# EAGLE board SparkFun_XBee_Explorer_USB-C-Panel (EAGLE 9.6.2), part 1 of 2
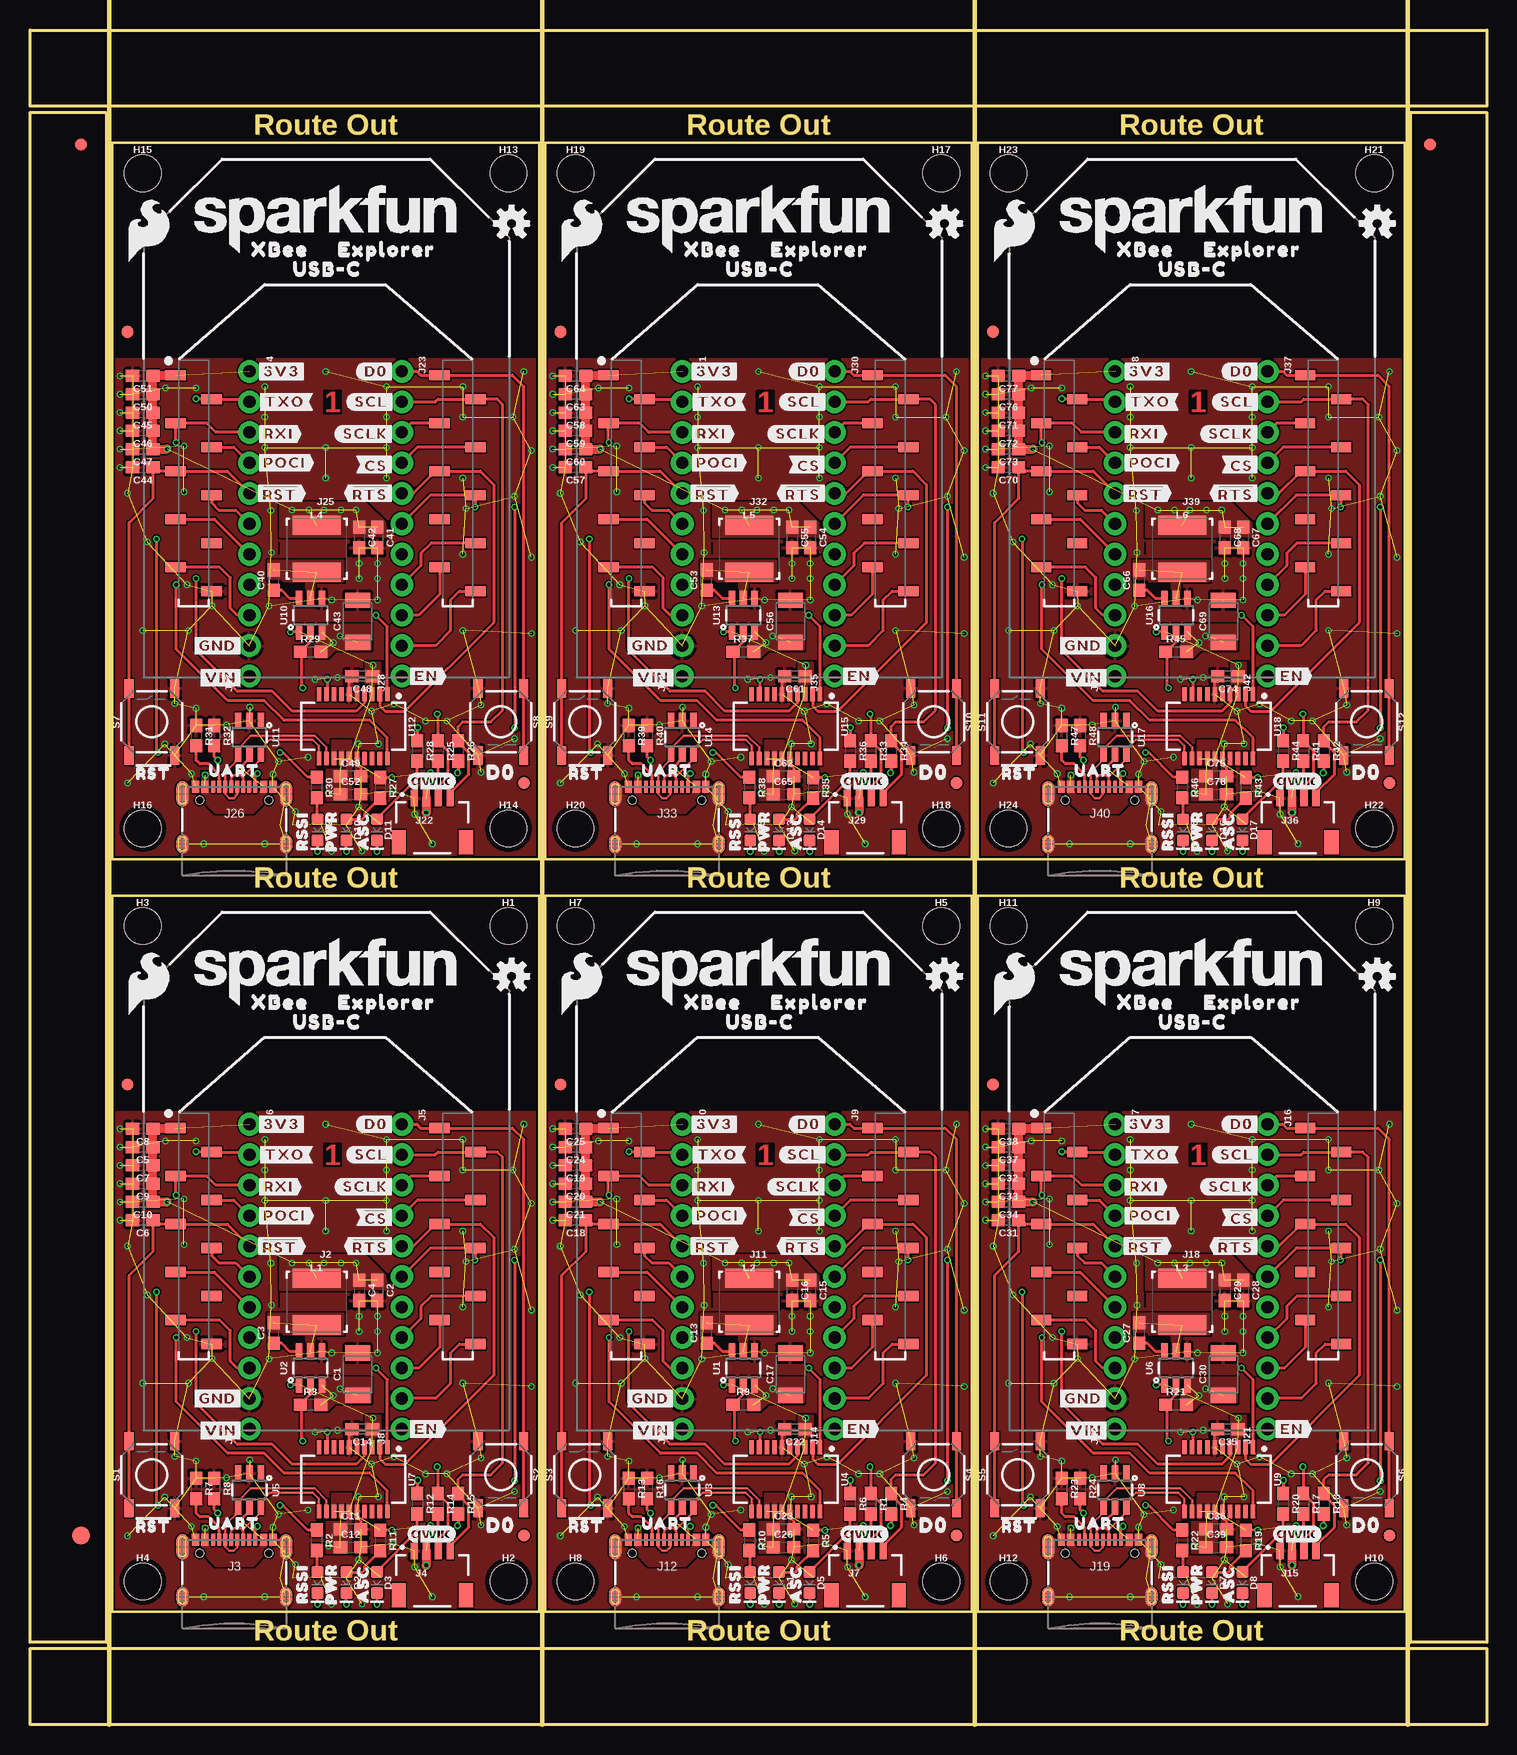
[diagram p0: board, top side]
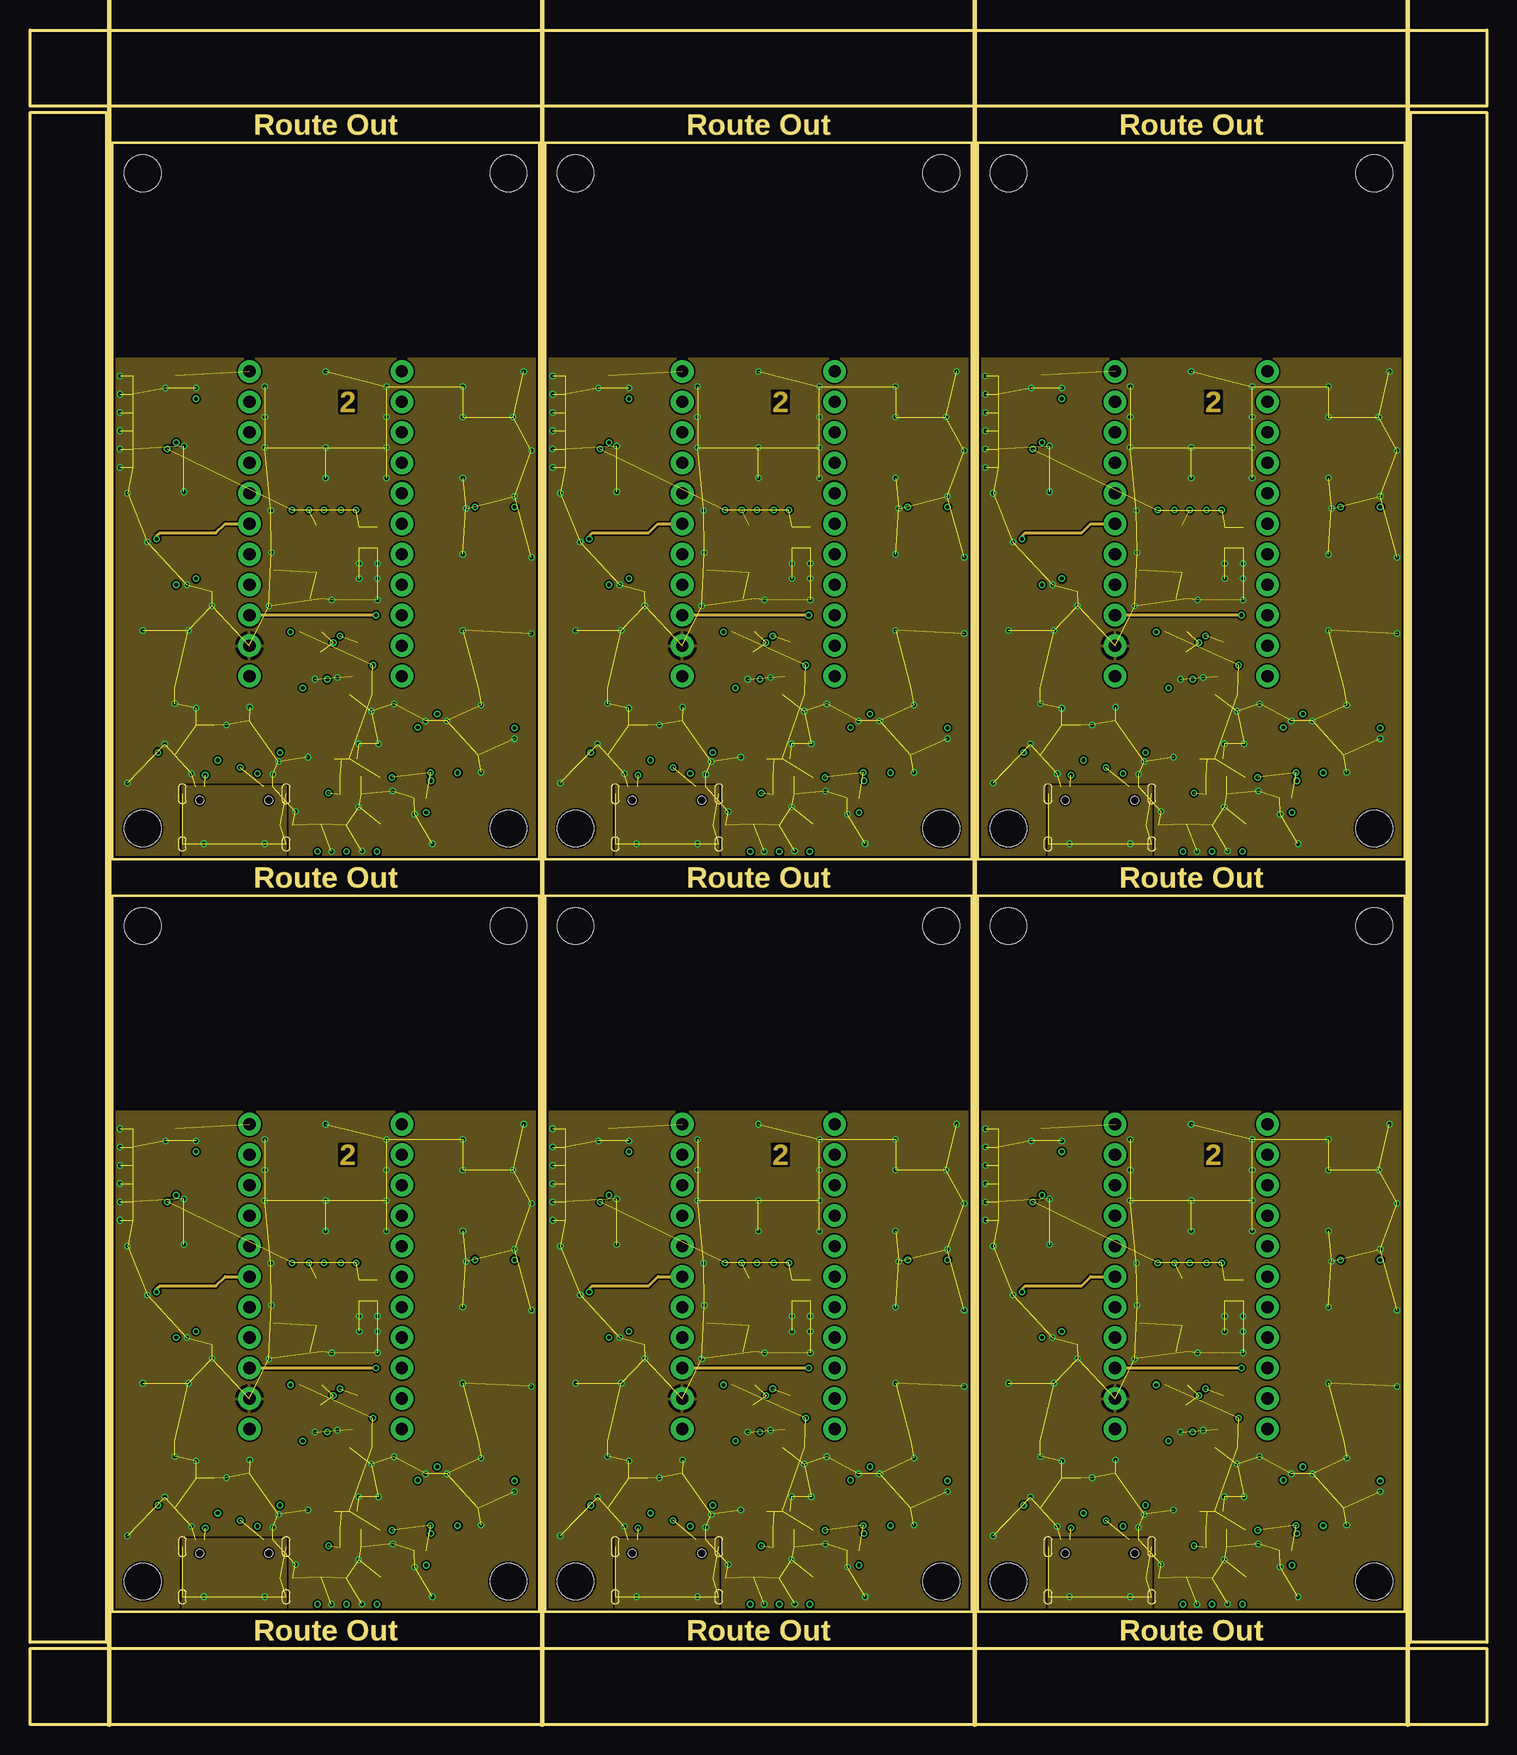
[diagram p1: board, inner layer Route2]
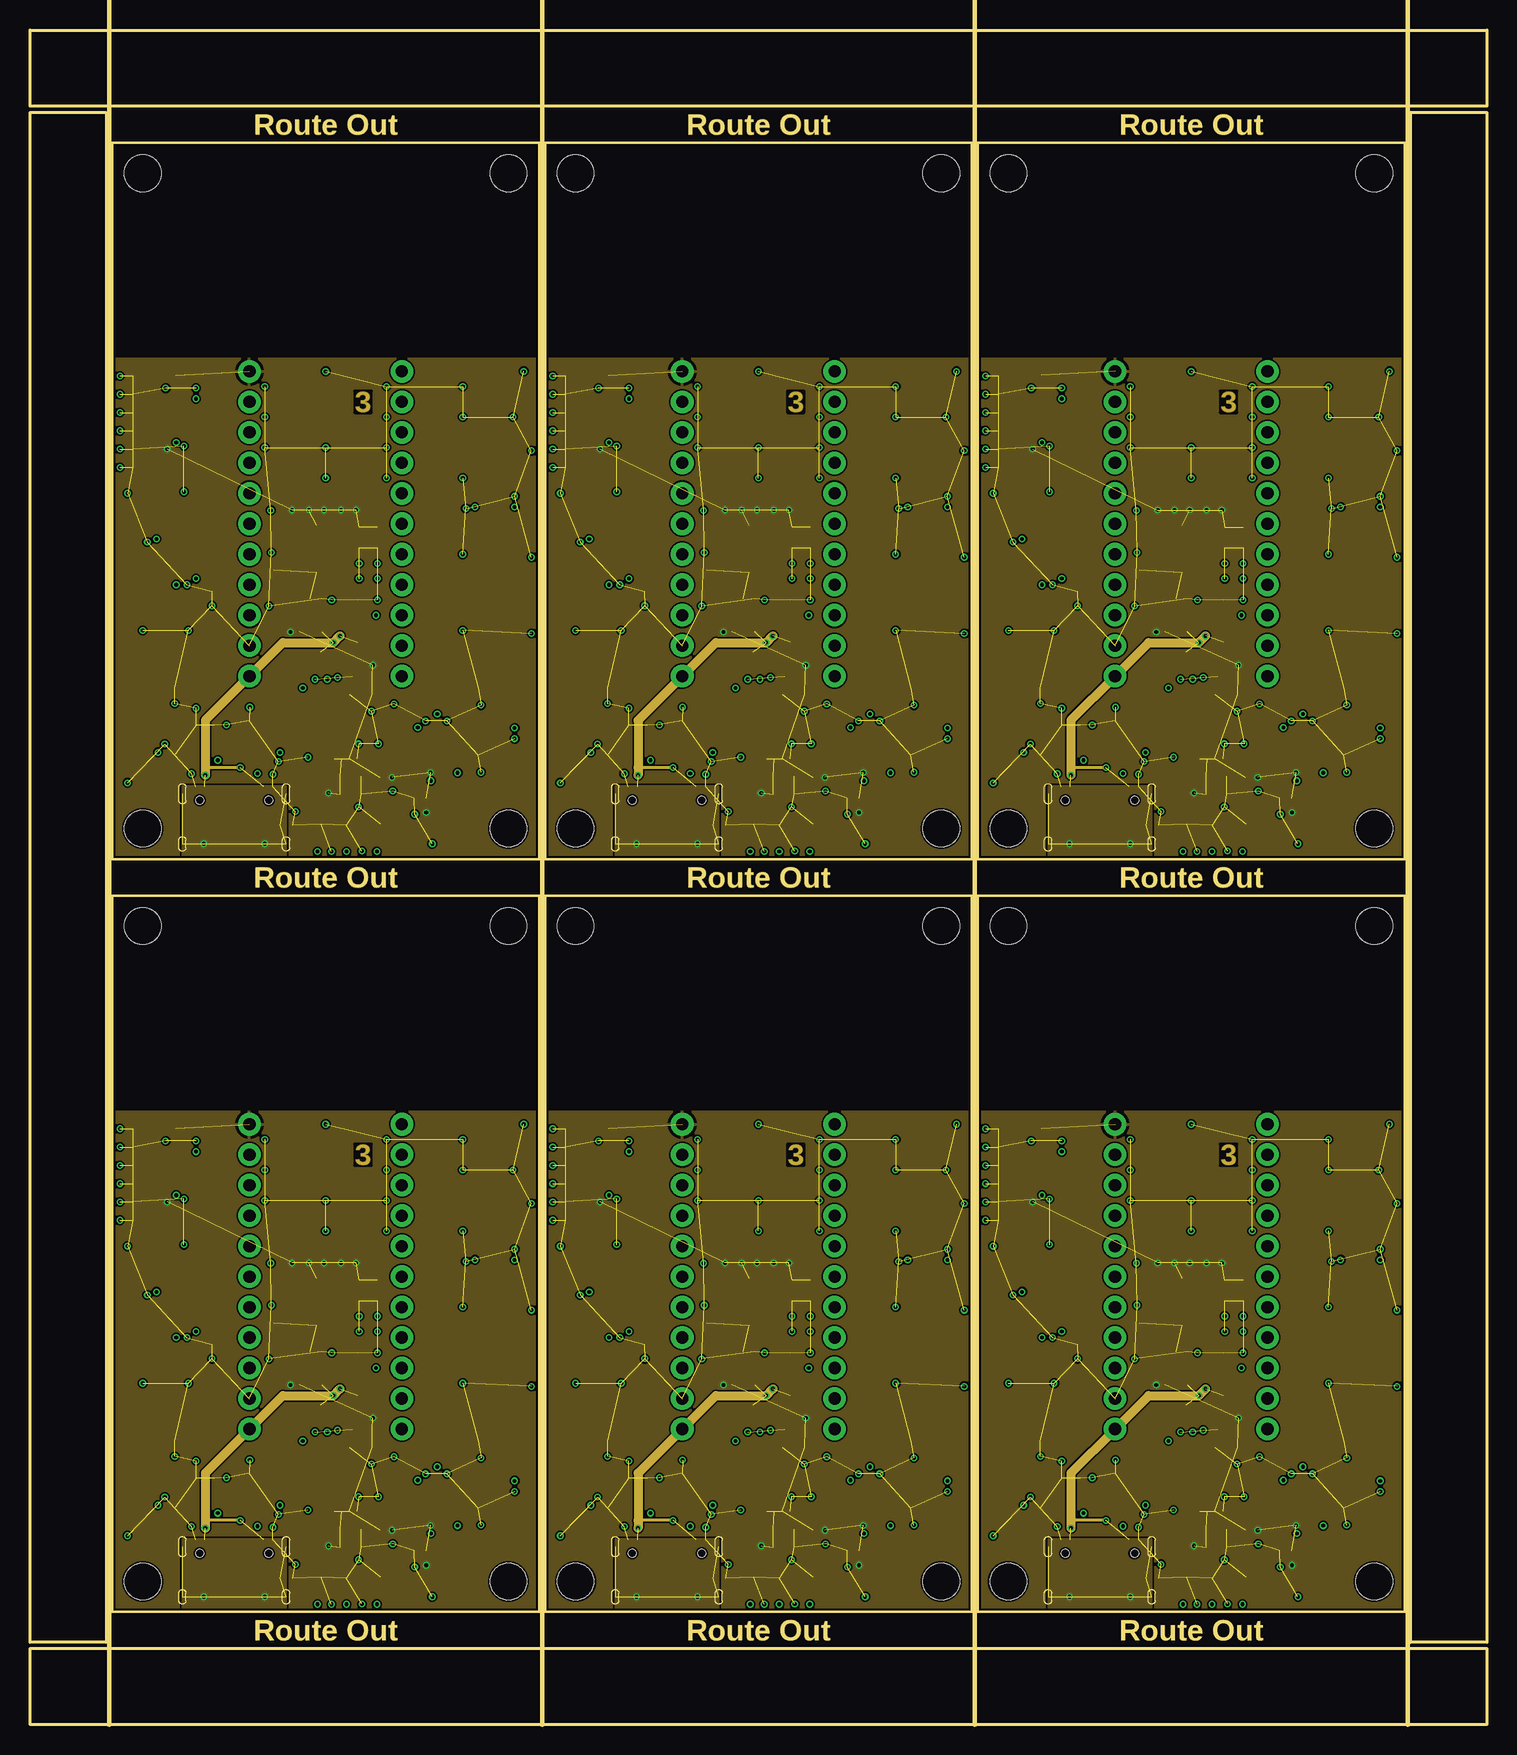
[diagram p2: board, inner layer Route15]
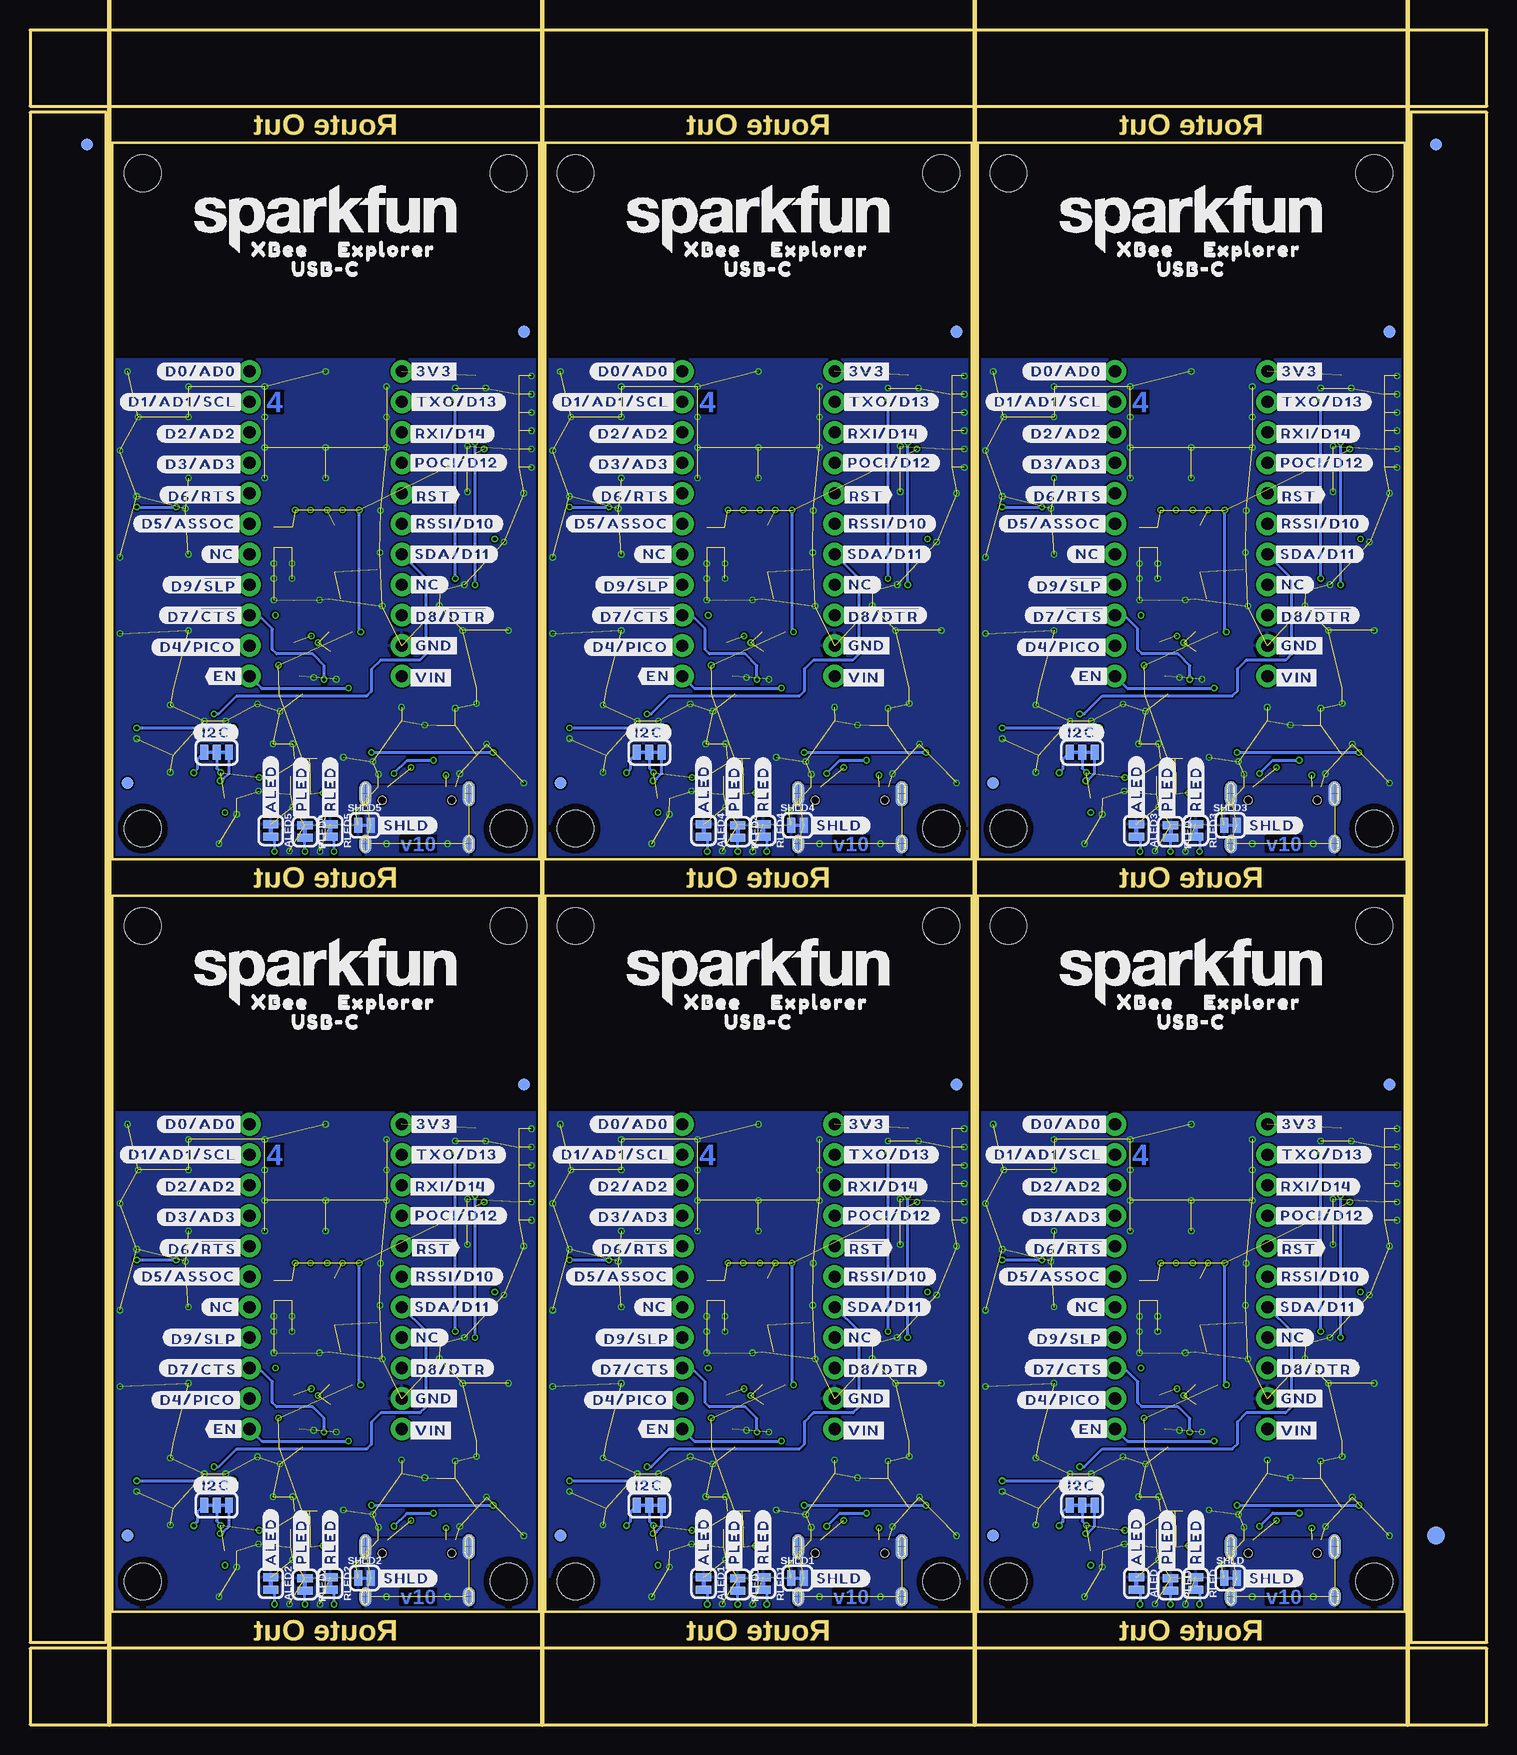
[diagram p3: board, bottom side, seen from below]

Size 121.41 x 141.22 mm. Coordinates in mm from the lower left corner, seen from the top.
Outline: 6.86,69.09 6.86,9.4 42.42,9.4 42.42,69.09 6.86,69.09
Outline: 42.93,69.09 42.93,9.4 78.49,9.4 78.49,69.09 42.93,69.09
Outline: 78.99,69.09 78.99,9.4 114.55,9.4 114.55,69.09 78.99,69.09
Outline: 6.86,131.83 6.86,72.14 42.42,72.14 42.42,131.83 6.86,131.83
Outline: 42.93,131.83 42.93,72.14 78.49,72.14 78.49,131.83 42.93,131.83
Outline: 78.99,131.83 78.99,72.14 114.55,72.14 114.55,131.83 78.99,131.83
Outline: 0,6.35 121.41,6.35 121.41,0 0,0 0,6.35
Outline: 115.06,134.37 121.41,134.37 121.41,6.86 115.06,6.86 115.06,134.37
Outline: 0,141.22 121.41,141.22 121.41,134.87 0,134.87 0,141.22
Outline: 0,134.37 6.35,134.37 6.35,6.86 0,6.86 0,134.37
Copper layers (1*2*15*16): Top 0.035559375mm / dielectric 0.47751875mm / Route2 0.035559375mm / dielectric 0.47751875mm / Route15 0.035559375mm / dielectric 0.47751875mm / Bottom 0.035559375mm
Design rules "SparkFun_XBee_Explorer_USB-C": minimum track width 5mil, minimum drill 0.2mm, track to track 5mil, track to pad 5mil, pad to pad 5mil, via to via 5mil, smd to smd 5mil, copper to edge 7mil, drill to drill 7mil, minimum pad ring 5mil, minimum via ring 5mil, stop-mask expansion 2.5mil, vias tented up to drill 25mil, thermal gap 10mil
Net classes: 2 Diff pairs: width 0.203 mm, drill 0.305 mm, clearance 0.152 mm
tRestrict: area 20.7,34.8 to 20.8,35.8; area 26.4,34.5 to 26.5,35.7; area 56.8,34.8 to 56.9,35.8; area 62.5,34.5 to 62.6,35.7; area 92.8,34.8 to 93,35.8; area 98.6,34.5 to 98.7,35.7; area 20.7,97.5 to 20.8,98.6; area 26.4,97.3 to 26.5,98.4; area 56.8,97.5 to 56.9,98.6; area 62.5,97.3 to 62.6,98.4; area 92.8,97.5 to 93,98.6; area 98.6,97.3 to 98.7,98.4
Milling: 5 lines

## Footprints (pad centres in the part's own frame; a part is rotated, then mirrored left to right if it is on the bottom)
SMT-JUMPER_2_NC_TRACE_SILK = smd 0.66 x 1.27: 1 -0.521,0; 2 0.521,0
1210 = smd 1.27 x 2.06: 1 -1.755,0; 2 1.755,0
0603 = smd 1.1 x 1: 1 -0.85,0; 2 0.85,0
LED-0603 = smd 1 x 1: A -0.877,0; C 0.877,0
FIDUCIAL-1X2 = smd 1 x 1: 1 0,0
FIDUCIAL-1.5X3 = smd 1.5 x 1.5: 1 0,0
STAND-OFF-TIGHT = hole 3.048: 0,0
SMT-JUMPER_3_2-NC_TRACE_SILK = smd 0.66 x 1.27: 1 -1.041,0; 2 0,0; 3 1.041,0
1X01_NO_SILK_STAND = drill 1.016 pad 1.88: 1 0,0
XBEE3-SMD = smd 1.7 x 0.85: 1 -12.5,11.11; 2 -9.5,9.11; 3 -12.5,7.11; 4 -9.5,5.11; 5 -12.5,3.11; 6 -9.5,1.11; 7 -12.5,-0.89; 8 -9.5,-2.89; 9 -12.5,-4.89; 10 -9.5,-6.89; 11 12.5,-6.89; 12 9.5,-4.89; 13 12.5,-2.89; 14 9.5,-0.89; 15 12.5,1.11; 16 9.5,3.11; 17 12.5,5.11; 18 9.5,7.11; 19 12.5,9.11; 20 9.5,11.11
USB-C-16P-4LAYER-ISOLATED = smd 0.3 x 1: A5 -1.25,-0.34; A6 -0.25,-0.34; A7 0.25,-0.34; A8 1.25,-0.34; B5 1.75,-0.34; B6 0.75,-0.34; B7 -0.75,-0.34; B8 -1.75,-0.34 | smd 0.6 x 1: GND -3.225,-0.34; GND2 3.225,-0.34; VBUS1 -2.45,-0.34; VBUS2 2.45,-0.34 | smd 1 x 2.1: SHLD1 -4.32,-0.915; SHLD2 4.32,-0.915 | smd 1 x 2.1 bottom: SHLD3 -4.32,-0.915; SHLD4 4.32,-0.915 | smd 1 x 1.6: SHLD5 -4.32,-5.095; SHLD8 4.32,-5.095 | smd 1 x 1.6 bottom: SHLD6 -4.32,-5.095; SHLD7 4.32,-5.095 | hole 0.65: -2.89,-1.445; 2.89,-1.445
JST04_1MM_RA = smd 0.6 x 1.35: 1 -1.5,0; 2 -0.5,0; 3 0.5,0; 4 1.5,0 | smd 1.2 x 2: NC1 2.8,-3.675; NC2 -2.8,-3.675
1X10_NO_SILK = drill 1.016 pad 1.88: 1 0,0; 2 2.54,0; 3 5.08,0; 4 7.62,0; 5 10.16,0; 6 12.7,0; 7 15.24,0; 8 17.78,0; 9 20.32,0; 10 22.86,0
INDUCTOR_3.9UH = smd 4 x 1.6: P$1 0,-2; P$2 0,1.9
TACTILE_SWITCH_SMD_5.2MM = smd 1.524 x 0.762: 1 -2.794,1.905; 2 2.794,1.905; 3 -2.794,-1.905; 4 2.794,-1.905
SOT23-6 = smd 0.55 x 1.35: 1 -0.95,-1.375; 2 0,-1.375; 3 0.95,-1.375; 4 0.95,1.375; 5 0,1.375; 6 -0.95,1.375
SOT-23-6 = smd 0.55 x 1.35: 1 -0.95,-1.375; 2 0,-1.375; 3 0.95,-1.375; 4 0.95,1.375; 5 0,1.375; 6 -0.95,1.375
SSOP20_L = smd 0.381 x 1.143: 1 -2.857,-2.68; 2 -2.223,-2.68; 3 -1.587,-2.68; 4 -0.953,-2.68; 5 -0.318,-2.68; 6 0.318,-2.68; 7 0.953,-2.68; 8 1.587,-2.68; 9 2.223,-2.68; 10 2.857,-2.68; 11 2.857,2.68; 12 2.223,2.68; 13 1.587,2.68; 14 0.953,2.68; 15 0.318,2.68; 16 -0.318,2.68; 17 -0.953,2.68; 18 -1.587,2.68; 19 -2.223,2.68; 20 -2.857,2.68

## Placement (x,y rotation side)
ALED  JUMPER-SMT_2_NC_TRACE_SILK  [SMT-JUMPER_2_NC_TRACE_SILK]  29.21,11.78 270 bottom
ALED1  JUMPER-SMT_2_NC_TRACE_SILK  [SMT-JUMPER_2_NC_TRACE_SILK]  65.28,11.78 270 bottom
ALED2  JUMPER-SMT_2_NC_TRACE_SILK  [SMT-JUMPER_2_NC_TRACE_SILK]  101.35,11.78 270 bottom
ALED3  JUMPER-SMT_2_NC_TRACE_SILK  [SMT-JUMPER_2_NC_TRACE_SILK]  29.21,74.52 270 bottom
ALED4  JUMPER-SMT_2_NC_TRACE_SILK  [SMT-JUMPER_2_NC_TRACE_SILK]  65.28,74.52 270 bottom
ALED5  JUMPER-SMT_2_NC_TRACE_SILK  [SMT-JUMPER_2_NC_TRACE_SILK]  101.35,74.52 270 bottom
C1  10uF  [1210]  27.3,29.21 90 top
C2  22uF  [0603]  28.96,36.2 270 top
C3  0.1uF  [0603]  20.32,32.64 90 top
C4  22uF  [0603]  27.43,36.2 270 top
C5  47pF  [0603]  9.4,48.13 180 top
C6  10nF  [0603]  9.4,42.04 180 top
C7  10nF  [0603]  9.4,46.61 180 top
C8  10pF  [0603]  9.4,49.66 180 top
C9  0.1uF  [0603]  9.4,45.08 180 top
C10  10uF  [0603]  9.4,43.56 180 top
C11  0.1uF  [0603]  26.72,16.31 0 top
C12  4.7uF  [0603]  26.72,14.78 0 top
C13  0.1uF  [0603]  56.39,32.64 90 top
C14  0.1uF  [0603]  27.69,24.64 180 top
C15  22uF  [0603]  65.02,36.2 270 top
C16  22uF  [0603]  63.5,36.2 270 top
C17  10uF  [1210]  63.37,29.21 90 top
C18  10nF  [0603]  45.47,42.04 180 top
C19  10nF  [0603]  45.47,46.61 180 top
C20  0.1uF  [0603]  45.47,45.08 180 top
C21  10uF  [0603]  45.47,43.56 180 top
C22  0.1uF  [0603]  63.75,24.64 180 top
C23  0.1uF  [0603]  62.79,16.31 0 top
C24  47pF  [0603]  45.47,48.13 180 top
C25  10pF  [0603]  45.47,49.66 180 top
C26  4.7uF  [0603]  62.79,14.78 0 top
C27  0.1uF  [0603]  92.46,32.64 90 top
C28  22uF  [0603]  101.09,36.2 270 top
C29  22uF  [0603]  99.57,36.2 270 top
C30  10uF  [1210]  99.44,29.21 90 top
C31  10nF  [0603]  81.53,42.04 180 top
C32  10nF  [0603]  81.53,46.61 180 top
C33  0.1uF  [0603]  81.53,45.08 180 top
C34  10uF  [0603]  81.53,43.56 180 top
C35  0.1uF  [0603]  99.82,24.64 180 top
C36  0.1uF  [0603]  98.86,16.31 0 top
C37  47pF  [0603]  81.53,48.13 180 top
C38  10pF  [0603]  81.53,49.66 180 top
C39  4.7uF  [0603]  98.86,14.78 0 top
C40  0.1uF  [0603]  20.32,95.38 90 top
C41  22uF  [0603]  28.96,98.93 270 top
C42  22uF  [0603]  27.43,98.93 270 top
C43  10uF  [1210]  27.3,91.95 90 top
C44  10nF  [0603]  9.4,104.77 180 top
C45  10nF  [0603]  9.4,109.35 180 top
C46  0.1uF  [0603]  9.4,107.82 180 top
C47  10uF  [0603]  9.4,106.3 180 top
C48  0.1uF  [0603]  27.69,87.38 180 top
C49  0.1uF  [0603]  26.72,79.04 0 top
C50  47pF  [0603]  9.4,110.87 180 top
C51  10pF  [0603]  9.4,112.39 180 top
C52  4.7uF  [0603]  26.72,77.52 0 top
C53  0.1uF  [0603]  56.39,95.38 90 top
C54  22uF  [0603]  65.02,98.93 270 top
C55  22uF  [0603]  63.5,98.93 270 top
C56  10uF  [1210]  63.37,91.95 90 top
C57  10nF  [0603]  45.47,104.77 180 top
C58  10nF  [0603]  45.47,109.35 180 top
C59  0.1uF  [0603]  45.47,107.82 180 top
C60  10uF  [0603]  45.47,106.3 180 top
C61  0.1uF  [0603]  63.75,87.38 180 top
C62  0.1uF  [0603]  62.79,79.04 0 top
C63  47pF  [0603]  45.47,110.87 180 top
C64  10pF  [0603]  45.47,112.39 180 top
C65  4.7uF  [0603]  62.79,77.52 0 top
C66  0.1uF  [0603]  92.46,95.38 90 top
C67  22uF  [0603]  101.09,98.93 270 top
C68  22uF  [0603]  99.57,98.93 270 top
C69  10uF  [1210]  99.44,91.95 90 top
C70  10nF  [0603]  81.53,104.77 180 top
C71  10nF  [0603]  81.53,109.35 180 top
C72  0.1uF  [0603]  81.53,107.82 180 top
C73  10uF  [0603]  81.53,106.3 180 top
C74  0.1uF  [0603]  99.82,87.38 180 top
C75  0.1uF  [0603]  98.86,79.04 0 top
C76  47pF  [0603]  81.53,110.87 180 top
C77  10pF  [0603]  81.53,112.39 180 top
C78  4.7uF  [0603]  98.86,77.52 0 top
D1  Red  [LED-0603]  62.43,11.84 270 top
D2  Red  [LED-0603]  26.37,11.84 270 top
D3  BLUE  [LED-0603]  28.91,11.84 270 top
D4  Yellow  [LED-0603]  23.95,11.84 270 top
D5  BLUE  [LED-0603]  64.97,11.84 270 top
D6  Yellow  [LED-0603]  60.02,11.84 270 top
D7  Red  [LED-0603]  98.5,11.84 270 top
D8  BLUE  [LED-0603]  101.04,11.84 270 top
D9  Yellow  [LED-0603]  96.09,11.84 270 top
D10  Red  [LED-0603]  26.37,74.57 270 top
D11  BLUE  [LED-0603]  28.91,74.57 270 top
D12  Yellow  [LED-0603]  23.95,74.57 270 top
D13  Red  [LED-0603]  62.43,74.57 270 top
D14  BLUE  [LED-0603]  64.97,74.57 270 top
D15  Yellow  [LED-0603]  60.02,74.57 270 top
D16  Red  [LED-0603]  98.5,74.57 270 top
D17  BLUE  [LED-0603]  101.04,74.57 270 top
D18  Yellow  [LED-0603]  96.09,74.57 270 top
E$1  [FIDUCIAL-1X2]  4.23,131.7 0 top
E$2  [FIDUCIAL-1X2]  4.23,131.7 0 bottom
E$3  [FIDUCIAL-1X2]  116.67,131.7 0 top
E$4  [FIDUCIAL-1X2]  116.67,131.7 0 bottom
E$5  [FIDUCIAL-1.5X3]  4.23,15.75 0 top
E$6  [FIDUCIAL-1.5X3]  4.23,15.75 0 bottom
FD1  FIDUCIAL1X2  [FIDUCIAL-1X2]  8.13,53.34 0 top
FD2  FIDUCIAL1X2  [FIDUCIAL-1X2]  8.13,53.34 0 bottom
FD3  FIDUCIAL1X2  [FIDUCIAL-1X2]  41.15,15.75 0 top
FD4  FIDUCIAL1X2  [FIDUCIAL-1X2]  41.15,15.75 0 bottom
FD5  FIDUCIAL1X2  [FIDUCIAL-1X2]  44.2,53.34 0 top
FD6  FIDUCIAL1X2  [FIDUCIAL-1X2]  44.2,53.34 0 bottom
FD7  FIDUCIAL1X2  [FIDUCIAL-1X2]  77.22,15.75 0 top
FD8  FIDUCIAL1X2  [FIDUCIAL-1X2]  77.22,15.75 0 bottom
FD9  FIDUCIAL1X2  [FIDUCIAL-1X2]  80.26,53.34 0 top
FD10  FIDUCIAL1X2  [FIDUCIAL-1X2]  80.26,53.34 0 bottom
FD11  FIDUCIAL1X2  [FIDUCIAL-1X2]  113.28,15.75 0 top
FD12  FIDUCIAL1X2  [FIDUCIAL-1X2]  113.28,15.75 0 bottom
FD13  FIDUCIAL1X2  [FIDUCIAL-1X2]  8.13,116.08 0 top
FD14  FIDUCIAL1X2  [FIDUCIAL-1X2]  8.13,116.08 0 bottom
FD15  FIDUCIAL1X2  [FIDUCIAL-1X2]  41.15,78.49 0 top
FD16  FIDUCIAL1X2  [FIDUCIAL-1X2]  41.15,78.49 0 bottom
FD17  FIDUCIAL1X2  [FIDUCIAL-1X2]  44.2,116.08 0 top
FD18  FIDUCIAL1X2  [FIDUCIAL-1X2]  44.2,116.08 0 bottom
FD19  FIDUCIAL1X2  [FIDUCIAL-1X2]  77.22,78.49 0 top
FD20  FIDUCIAL1X2  [FIDUCIAL-1X2]  77.22,78.49 0 bottom
FD21  FIDUCIAL1X2  [FIDUCIAL-1X2]  80.26,116.08 0 top
FD22  FIDUCIAL1X2  [FIDUCIAL-1X2]  80.26,116.08 0 bottom
FD23  FIDUCIAL1X2  [FIDUCIAL-1X2]  113.28,78.49 0 top
FD24  FIDUCIAL1X2  [FIDUCIAL-1X2]  113.28,78.49 0 bottom
H1  STAND-OFFTIGHT  [STAND-OFF-TIGHT]  39.88,66.55 0 top
H2  STAND-OFFTIGHT  [STAND-OFF-TIGHT]  39.88,11.94 0 top
H3  STAND-OFFTIGHT  [STAND-OFF-TIGHT]  9.4,66.55 0 top
H4  STAND-OFFTIGHT  [STAND-OFF-TIGHT]  9.4,11.94 0 top
H5  STAND-OFFTIGHT  [STAND-OFF-TIGHT]  75.95,66.55 0 top
H6  STAND-OFFTIGHT  [STAND-OFF-TIGHT]  75.95,11.94 0 top
H7  STAND-OFFTIGHT  [STAND-OFF-TIGHT]  45.47,66.55 0 top
H8  STAND-OFFTIGHT  [STAND-OFF-TIGHT]  45.47,11.94 0 top
H9  STAND-OFFTIGHT  [STAND-OFF-TIGHT]  112.01,66.55 0 top
H10  STAND-OFFTIGHT  [STAND-OFF-TIGHT]  112.01,11.94 0 top
H11  STAND-OFFTIGHT  [STAND-OFF-TIGHT]  81.53,66.55 0 top
H12  STAND-OFFTIGHT  [STAND-OFF-TIGHT]  81.53,11.94 0 top
H13  STAND-OFFTIGHT  [STAND-OFF-TIGHT]  39.88,129.29 0 top
H14  STAND-OFFTIGHT  [STAND-OFF-TIGHT]  39.88,74.68 0 top
H15  STAND-OFFTIGHT  [STAND-OFF-TIGHT]  9.4,129.29 0 top
H16  STAND-OFFTIGHT  [STAND-OFF-TIGHT]  9.4,74.68 0 top
H17  STAND-OFFTIGHT  [STAND-OFF-TIGHT]  75.95,129.29 0 top
H18  STAND-OFFTIGHT  [STAND-OFF-TIGHT]  75.95,74.68 0 top
H19  STAND-OFFTIGHT  [STAND-OFF-TIGHT]  45.47,129.29 0 top
H20  STAND-OFFTIGHT  [STAND-OFF-TIGHT]  45.47,74.68 0 top
H21  STAND-OFFTIGHT  [STAND-OFF-TIGHT]  112.01,129.29 0 top
H22  STAND-OFFTIGHT  [STAND-OFF-TIGHT]  112.01,74.68 0 top
H23  STAND-OFFTIGHT  [STAND-OFF-TIGHT]  81.53,129.29 0 top
H24  STAND-OFFTIGHT  [STAND-OFF-TIGHT]  81.53,74.68 0 top
I2C_PU  JUMPER-SMT_3_2-NC_TRACE_SILK  [SMT-JUMPER_3_2-NC_TRACE_SILK]  33.73,18.29 0 bottom
I2C_PU1  JUMPER-SMT_3_2-NC_TRACE_SILK  [SMT-JUMPER_3_2-NC_TRACE_SILK]  69.8,18.29 0 bottom
I2C_PU2  JUMPER-SMT_3_2-NC_TRACE_SILK  [SMT-JUMPER_3_2-NC_TRACE_SILK]  105.87,18.29 0 bottom
I2C_PU3  JUMPER-SMT_3_2-NC_TRACE_SILK  [SMT-JUMPER_3_2-NC_TRACE_SILK]  33.73,81.03 0 bottom
I2C_PU4  JUMPER-SMT_3_2-NC_TRACE_SILK  [SMT-JUMPER_3_2-NC_TRACE_SILK]  69.8,81.03 0 bottom
I2C_PU5  JUMPER-SMT_3_2-NC_TRACE_SILK  [SMT-JUMPER_3_2-NC_TRACE_SILK]  105.87,81.03 0 bottom
J1  [1X01_NO_SILK_STAND]  18.29,24.64 90 top
J2  [XBEE3-SMD]  24.64,38.61 0 top
J3  USB Female Type C Connector  [USB-C-16P-4LAYER-ISOLATED]  17.02,15.75 0 top
J4  QWIIC_RIGHT_ANGLE  [JST04_1MM_RA]  33.53,14.48 0 top
J5  [1X10_NO_SILK]  30.99,50.04 270 top
J6  [1X10_NO_SILK]  18.29,50.04 270 top
J7  QWIIC_RIGHT_ANGLE  [JST04_1MM_RA]  69.6,14.48 0 top
J8  [1X01_NO_SILK_STAND]  30.99,24.64 90 top
J9  [1X10_NO_SILK]  67.06,50.04 270 top
J10  [1X10_NO_SILK]  54.36,50.04 270 top
J11  [XBEE3-SMD]  60.71,38.61 0 top
J12  USB Female Type C Connector  [USB-C-16P-4LAYER-ISOLATED]  53.09,15.75 0 top
J13  [1X01_NO_SILK_STAND]  54.36,24.64 90 top
J14  [1X01_NO_SILK_STAND]  67.06,24.64 90 top
J15  QWIIC_RIGHT_ANGLE  [JST04_1MM_RA]  105.66,14.48 0 top
J16  [1X10_NO_SILK]  103.12,50.04 270 top
J17  [1X10_NO_SILK]  90.42,50.04 270 top
J18  [XBEE3-SMD]  96.77,38.61 0 top
J19  USB Female Type C Connector  [USB-C-16P-4LAYER-ISOLATED]  89.15,15.75 0 top
J20  [1X01_NO_SILK_STAND]  90.42,24.64 90 top
J21  [1X01_NO_SILK_STAND]  103.12,24.64 90 top
J22  QWIIC_RIGHT_ANGLE  [JST04_1MM_RA]  33.53,77.22 0 top
J23  [1X10_NO_SILK]  30.99,112.78 270 top
J24  [1X10_NO_SILK]  18.29,112.78 270 top
J25  [XBEE3-SMD]  24.64,101.35 0 top
J26  USB Female Type C Connector  [USB-C-16P-4LAYER-ISOLATED]  17.02,78.49 0 top
J27  [1X01_NO_SILK_STAND]  18.29,87.38 90 top
J28  [1X01_NO_SILK_STAND]  30.99,87.38 90 top
J29  QWIIC_RIGHT_ANGLE  [JST04_1MM_RA]  69.6,77.22 0 top
J30  [1X10_NO_SILK]  67.06,112.78 270 top
J31  [1X10_NO_SILK]  54.36,112.78 270 top
J32  [XBEE3-SMD]  60.71,101.35 0 top
J33  USB Female Type C Connector  [USB-C-16P-4LAYER-ISOLATED]  53.09,78.49 0 top
J34  [1X01_NO_SILK_STAND]  54.36,87.38 90 top
J35  [1X01_NO_SILK_STAND]  67.06,87.38 90 top
J36  QWIIC_RIGHT_ANGLE  [JST04_1MM_RA]  105.66,77.22 0 top
J37  [1X10_NO_SILK]  103.12,112.78 270 top
J38  [1X10_NO_SILK]  90.42,112.78 270 top
J39  [XBEE3-SMD]  96.77,101.35 0 top
J40  USB Female Type C Connector  [USB-C-16P-4LAYER-ISOLATED]  89.15,78.49 0 top
J41  [1X01_NO_SILK_STAND]  90.42,87.38 90 top
J42  [1X01_NO_SILK_STAND]  103.12,87.38 90 top
L1  3.9UH  [INDUCTOR_3.9UH]  23.88,35.31 0 top
L2  3.9UH  [INDUCTOR_3.9UH]  59.94,35.31 0 top
L3  3.9UH  [INDUCTOR_3.9UH]  96.01,35.31 0 top
L4  3.9UH  [INDUCTOR_3.9UH]  23.88,98.04 0 top
L5  3.9UH  [INDUCTOR_3.9UH]  59.94,98.04 0 top
L6  3.9UH  [INDUCTOR_3.9UH]  96.01,98.04 0 top
LOGO1  SFE_LOGO_NAME.2_INCH  [SFE_LOGO_NAME_.2]  24.64,62.74 0 top
LOGO2  OSHW-LOGOS  [OSHW-LOGO-S]  40.13,62.36 0 top
LOGO3  QWIIC_LOGO_4MM  [QWIIC_4MM]  33.48,15.88 0 top
LOGO4  OSHW-LOGOS  [OSHW-LOGO-S]  76.2,62.36 0 top
LOGO5  QWIIC_LOGO_4MM  [QWIIC_4MM]  69.55,15.88 0 top
LOGO6  SFE_LOGO_NAME.2_INCH  [SFE_LOGO_NAME_.2]  60.71,62.74 0 top
LOGO7  OSHW-LOGOS  [OSHW-LOGO-S]  112.27,62.36 0 top
LOGO8  QWIIC_LOGO_4MM  [QWIIC_4MM]  105.61,15.88 0 top
LOGO9  SFE_LOGO_NAME.2_INCH  [SFE_LOGO_NAME_.2]  96.77,62.74 0 top
LOGO10  OSHW-LOGOS  [OSHW-LOGO-S]  40.13,125.09 0 top
LOGO11  QWIIC_LOGO_4MM  [QWIIC_4MM]  33.48,78.61 0 top
LOGO12  SFE_LOGO_NAME.2_INCH  [SFE_LOGO_NAME_.2]  24.64,125.48 0 top
LOGO13  OSHW-LOGOS  [OSHW-LOGO-S]  76.2,125.09 0 top
LOGO14  QWIIC_LOGO_4MM  [QWIIC_4MM]  69.55,78.61 0 top
LOGO15  SFE_LOGO_NAME.2_INCH  [SFE_LOGO_NAME_.2]  60.71,125.48 0 top
LOGO16  OSHW-LOGOS  [OSHW-LOGO-S]  112.27,125.09 0 top
LOGO17  QWIIC_LOGO_4MM  [QWIIC_4MM]  105.61,78.61 0 top
LOGO18  SFE_LOGO_NAME.2_INCH  [SFE_LOGO_NAME_.2]  96.77,125.48 0 top
PLED  JUMPER-SMT_2_NC_TRACE_SILK  [SMT-JUMPER_2_NC_TRACE_SILK]  26.37,11.68 270 bottom
PLED1  JUMPER-SMT_2_NC_TRACE_SILK  [SMT-JUMPER_2_NC_TRACE_SILK]  62.43,11.68 270 bottom
PLED2  JUMPER-SMT_2_NC_TRACE_SILK  [SMT-JUMPER_2_NC_TRACE_SILK]  98.5,11.68 270 bottom
PLED3  JUMPER-SMT_2_NC_TRACE_SILK  [SMT-JUMPER_2_NC_TRACE_SILK]  26.37,74.42 270 bottom
PLED4  JUMPER-SMT_2_NC_TRACE_SILK  [SMT-JUMPER_2_NC_TRACE_SILK]  62.43,74.42 270 bottom
PLED5  JUMPER-SMT_2_NC_TRACE_SILK  [SMT-JUMPER_2_NC_TRACE_SILK]  98.5,74.42 270 bottom
R1  2.2k  [0603]  70.05,18.41 270 top
R2  2.2k  [0603]  23.88,15.37 270 top
R3  10k  [0603]  23.37,26.67 0 top
R4  2.2k  [0603]  71.76,18.41 270 top
R5  4.7k  [0603]  65.25,15.34 270 top
R6  2.2k  [0603]  68.35,18.41 270 top
R7  5.1k  [0603]  13.84,19.69 270 top
R8  5.1k  [0603]  15.37,19.69 270 top
R9  10k  [0603]  59.44,26.67 0 top
R10  2.2k  [0603]  59.94,15.37 270 top
R11  4.7k  [0603]  29.18,15.34 270 top
R12  2.2k  [0603]  32.28,18.41 270 top
R13  5.1k  [0603]  49.91,19.69 270 top
R14  2.2k  [0603]  33.99,18.41 270 top
R15  2.2k  [0603]  35.69,18.41 270 top
R16  5.1k  [0603]  51.43,19.69 270 top
R17  2.2k  [0603]  106.12,18.41 270 top
R18  2.2k  [0603]  107.82,18.41 270 top
R19  4.7k  [0603]  101.32,15.34 270 top
R20  2.2k  [0603]  104.42,18.41 270 top
R21  10k  [0603]  95.5,26.67 0 top
R22  2.2k  [0603]  96.01,15.37 270 top
R23  5.1k  [0603]  85.98,19.69 270 top
R24  5.1k  [0603]  87.5,19.69 270 top
R25  2.2k  [0603]  33.99,81.15 270 top
R26  2.2k  [0603]  35.69,81.15 270 top
R27  4.7k  [0603]  29.18,78.08 270 top
R28  2.2k  [0603]  32.28,81.15 270 top
R29  10k  [0603]  23.37,89.41 0 top
R30  2.2k  [0603]  23.88,78.1 270 top
R31  5.1k  [0603]  13.84,82.42 270 top
R32  5.1k  [0603]  15.37,82.42 270 top
R33  2.2k  [0603]  70.05,81.15 270 top
R34  2.2k  [0603]  71.76,81.15 270 top
R35  4.7k  [0603]  65.25,78.08 270 top
R36  2.2k  [0603]  68.35,81.15 270 top
R37  10k  [0603]  59.44,89.41 0 top
R38  2.2k  [0603]  59.94,78.1 270 top
R39  5.1k  [0603]  49.91,82.42 270 top
R40  5.1k  [0603]  51.43,82.42 270 top
R41  2.2k  [0603]  106.12,81.15 270 top
R42  2.2k  [0603]  107.82,81.15 270 top
R43  4.7k  [0603]  101.32,78.08 270 top
R44  2.2k  [0603]  104.42,81.15 270 top
R45  10k  [0603]  95.5,89.41 0 top
R46  2.2k  [0603]  96.01,78.1 270 top
R47  5.1k  [0603]  85.98,82.42 270 top
R48  5.1k  [0603]  87.5,82.42 270 top
RLED  JUMPER-SMT_2_NC_TRACE_SILK  [SMT-JUMPER_2_NC_TRACE_SILK]  24.26,11.78 270 bottom
RLED1  JUMPER-SMT_2_NC_TRACE_SILK  [SMT-JUMPER_2_NC_TRACE_SILK]  60.32,11.78 270 bottom
RLED2  JUMPER-SMT_2_NC_TRACE_SILK  [SMT-JUMPER_2_NC_TRACE_SILK]  96.39,11.78 270 bottom
RLED3  JUMPER-SMT_2_NC_TRACE_SILK  [SMT-JUMPER_2_NC_TRACE_SILK]  24.26,74.52 270 bottom
RLED4  JUMPER-SMT_2_NC_TRACE_SILK  [SMT-JUMPER_2_NC_TRACE_SILK]  60.32,74.52 270 bottom
RLED5  JUMPER-SMT_2_NC_TRACE_SILK  [SMT-JUMPER_2_NC_TRACE_SILK]  96.39,74.52 270 bottom
S1  [TACTILE_SWITCH_SMD_5.2MM]  10.16,20.83 90 top
S2  [TACTILE_SWITCH_SMD_5.2MM]  39.24,20.83 270 top
S3  [TACTILE_SWITCH_SMD_5.2MM]  46.23,20.83 90 top
S4  [TACTILE_SWITCH_SMD_5.2MM]  75.31,20.83 270 top
S5  [TACTILE_SWITCH_SMD_5.2MM]  82.3,20.83 90 top
S6  [TACTILE_SWITCH_SMD_5.2MM]  111.38,20.83 270 top
S7  [TACTILE_SWITCH_SMD_5.2MM]  10.16,83.57 90 top
S8  [TACTILE_SWITCH_SMD_5.2MM]  39.24,83.57 270 top
S9  [TACTILE_SWITCH_SMD_5.2MM]  46.23,83.57 90 top
S10  [TACTILE_SWITCH_SMD_5.2MM]  75.31,83.57 270 top
S11  [TACTILE_SWITCH_SMD_5.2MM]  82.3,83.57 90 top
S12  [TACTILE_SWITCH_SMD_5.2MM]  111.38,83.57 270 top
SHLD  JUMPER-SMT_2_NC_TRACE_SILK  [SMT-JUMPER_2_NC_TRACE_SILK]  21.39,12.22 0 bottom
SHLD1  JUMPER-SMT_2_NC_TRACE_SILK  [SMT-JUMPER_2_NC_TRACE_SILK]  57.45,12.22 0 bottom
SHLD2  JUMPER-SMT_2_NC_TRACE_SILK  [SMT-JUMPER_2_NC_TRACE_SILK]  93.52,12.22 0 bottom
SHLD3  JUMPER-SMT_2_NC_TRACE_SILK  [SMT-JUMPER_2_NC_TRACE_SILK]  21.39,74.96 0 bottom
SHLD4  JUMPER-SMT_2_NC_TRACE_SILK  [SMT-JUMPER_2_NC_TRACE_SILK]  57.45,74.96 0 bottom
SHLD5  JUMPER-SMT_2_NC_TRACE_SILK  [SMT-JUMPER_2_NC_TRACE_SILK]  93.52,74.96 0 bottom
U1  AP63203  [SOT23-6]  59.44,29.72 0 top
U2  AP63203  [SOT23-6]  23.37,29.72 0 top
U3  ESD Diode  [SOT-23-6]  54.36,19.56 180 top
U4  FT231XS  [SSOP20_L]  62.99,20.45 180 top
U5  ESD Diode  [SOT-23-6]  18.29,19.56 180 top
U6  AP63203  [SOT23-6]  95.5,29.72 0 top
U7  FT231XS  [SSOP20_L]  26.92,20.45 180 top
U8  ESD Diode  [SOT-23-6]  90.42,19.56 180 top
U9  FT231XS  [SSOP20_L]  99.06,20.45 180 top
U10  AP63203  [SOT23-6]  23.37,92.46 0 top
U11  ESD Diode  [SOT-23-6]  18.29,82.3 180 top
U12  FT231XS  [SSOP20_L]  26.92,83.19 180 top
U13  AP63203  [SOT23-6]  59.44,92.46 0 top
U14  ESD Diode  [SOT-23-6]  54.36,82.3 180 top
U15  FT231XS  [SSOP20_L]  62.99,83.19 180 top
U16  AP63203  [SOT23-6]  95.5,92.46 0 top
U17  ESD Diode  [SOT-23-6]  90.42,82.3 180 top
U18  FT231XS  [SSOP20_L]  99.06,83.19 180 top
U$1  [RSSI31]  22.68,11.71 90 top
U$2  [PWR29]  25.1,11.71 90 top
U$3  [#GND#0]  15.62,27.18 0 top
U$4  [#SHLD#36]  17.91,12.19 0 bottom
U$5  [#NC#1]  16.13,32.26 0 bottom
U$6  [#D3#AD3#23]  35.05,42.29 0 bottom
U$7  [#NC#3]  33.27,34.8 0 bottom
U$8  [#D0#AD0#18]  35.05,50.04 0 bottom
U$9  [#3V3#1]  20.95,50.04 0 top
U$10  [XBEE340]  20.83,60.2 0 top
U$11  [#D1#AD1#SCL#8]  36.58,47.5 0 bottom
U$12  [#GND#0]  15.62,27.18 0 bottom
U$13  [#D8##DTR##27]  14.22,29.72 0 bottom
U$14  [#RSSI#D10#17]  13.84,37.34 0 bottom
U$15  [#SDA#D11#9]  14.1,34.8 0 bottom
U$16  [##RST##15]  15.62,39.75 0 bottom
U$17  [#POCI#D12#24]  13.72,42.42 0 bottom
U$18  [#RXI#D14#15]  14.22,44.83 0 bottom
U$19  [#D2#AD2#19]  35.05,44.83 0 bottom
U$20  [#D6##RTS##25]  34.92,39.75 0 bottom
U$21  [#TXO#8]  21.21,47.5 0 top
U$22  [#TXO#D13#13]  13.72,47.5 0 bottom
U$23  [XBEE340]  28.45,60.2 0 bottom
U$24  [USB#C1342]  24.77,58.55 0 top
U$25  [USB#C1342]  24.64,58.55 0 bottom
U$26  [#I2C#33]  33.78,19.94 0 bottom
U$27  [#RXI#7]  20.7,44.83 0 top
U$28  [UART34]  17.02,16.76 0 top
U$29  [ASC32]  27.76,11.71 90 top
U$30  [#RST#30]  10.29,16.65 0 top
U$31  [EXPLORER1344]  29.72,60.2 0 top
U$32  [EXPLORER1344]  19.56,60.2 0 bottom
U$33  [#3V3#1]  57.02,50.04 0 top
U$34  [#I2C#33]  69.85,19.94 0 bottom
U$35  [#D5#ASSOC#25]  36.07,37.34 0 bottom
U$36  [#D9##SLP##28]  34.8,32.26 0 bottom
U$37  [#D7##CTS##26]  34.92,29.72 0 bottom
U$38  [#D4#PICO#25]  35.31,27.05 0 bottom
U$39  [#3V3#1]  51.69,50.04 0 bottom
U$40  [D03]  39.24,16.63 0 top
U$41  [#VIN#4]  51.94,24.51 0 bottom
U$42  [D03]  75.31,16.63 0 top
U$43  [#RST#30]  46.35,16.65 0 top
U$44  [#3V3#1]  15.62,50.04 0 bottom
U$45  [#POCI#32]  21.21,42.42 0 top
U$46  [#VIN#4]  15.88,24.51 0 bottom
U$47  [SFE_LOGO_NAME_.2]  60.71,62.74 0 bottom
U$48  [#EN#17]  33.02,24.64 0 top
U$49  [#ALED#21]  29.21,15.24 90 bottom
U$50  [SFE_LOGO_FLAME_.2]  45.97,61.72 0 top
U$51  [#RLED#22]  24.26,15.24 90 bottom
U$52  [#PLED#20]  26.67,15.24 90 bottom
U$53  [#D0#AD0#18]  71.12,50.04 0 bottom
U$54  [##RST##13]  20.83,39.88 0 top
U$55  [#D2#AD2#19]  71.12,44.83 0 bottom
U$56  [#D3#AD3#23]  71.12,42.29 0 bottom
U$57  [#D6##RTS##25]  70.99,39.75 0 bottom
U$58  [##RTS##14]  28.32,39.88 0 top
U$59  [##CS##26]  28.83,42.29 0 top
U$60  [#SCLK#33]  27.94,44.83 0 top
U$61  [SFE_LOGO_FLAME_.2]  9.91,61.72 0 top
U$62  [#D5#ASSOC#25]  72.14,37.34 0 bottom
U$63  [SFE_LOGO_NAME_.2]  24.64,62.74 0 bottom
U$64  [#SCL#9]  28.45,47.5 0 top
U$65  [#D0#3]  28.83,50.04 0 top
U$66  [#VIN#4]  15.88,24.51 0 top
U$67  [#EN#15]  33.02,24.64 0 bottom
U$68  [#D9##SLP##28]  70.87,32.26 0 bottom
U$69  [#D7##CTS##26]  70.99,29.72 0 bottom
U$70  [#D4#PICO#25]  71.37,27.05 0 bottom
U$71  [#GND#0]  51.69,27.18 0 bottom
U$72  [#D8##DTR##27]  50.29,29.72 0 bottom
U$73  [#RSSI#D10#17]  49.91,37.34 0 bottom
U$74  [#SDA#D11#9]  50.16,34.8 0 bottom
U$75  [##RST##15]  51.69,39.75 0 bottom
U$76  [#POCI#D12#24]  49.78,42.42 0 bottom
U$77  [#RXI#D14#15]  50.29,44.83 0 bottom
U$78  [#TXO#D13#13]  49.78,47.5 0 bottom
U$79  [#EN#17]  69.09,24.64 0 top
U$80  [#ALED#21]  65.28,15.24 90 bottom
U$81  [#RLED#22]  60.32,15.24 90 bottom
U$82  [#PLED#20]  62.74,15.24 90 bottom
U$83  [#TXO#8]  57.28,47.5 0 top
U$84  [#RXI#7]  56.77,44.83 0 top
U$85  [#POCI#32]  57.28,42.42 0 top
U$86  [##RST##13]  56.9,39.88 0 top
U$87  [##RTS##14]  64.39,39.88 0 top
U$88  [##CS##26]  64.9,42.29 0 top
U$89  [#SCLK#33]  64.01,44.83 0 top
U$90  [#SCL#9]  64.52,47.5 0 top
U$91  [#D0#3]  64.9,50.04 0 top
U$92  [#VIN#4]  51.94,24.51 0 top
U$93  [#EN#15]  69.09,24.64 0 bottom
U$94  [#SHLD#36]  53.97,12.19 0 bottom
U$95  [#NC#1]  52.2,32.26 0 bottom
U$96  [#NC#3]  69.34,34.8 0 bottom
U$97  [USB#C1342]  60.83,58.55 0 top
U$98  [USB#C1342]  60.71,58.55 0 bottom
U$99  [UART34]  53.09,16.76 0 top
U$100  [#GND#0]  51.69,27.18 0 top
U$101  [XBEE340]  56.9,60.2 0 top
U$102  [XBEE340]  64.52,60.2 0 bottom
U$103  [ASC32]  63.83,11.71 90 top
U$104  [RSSI31]  58.75,11.71 90 top
U$105  [PWR29]  61.16,11.71 90 top
U$106  [#D1#AD1#SCL#8]  72.64,47.5 0 bottom
U$107  [EXPLORER1344]  65.79,60.2 0 top
U$108  [EXPLORER1344]  55.63,60.2 0 bottom
U$109  [#3V3#1]  93.09,50.04 0 top
U$110  [#I2C#33]  105.92,19.94 0 bottom
U$111  [#3V3#1]  87.76,50.04 0 bottom
U$112  [#VIN#4]  88.01,24.51 0 bottom
U$113  [D03]  111.38,16.63 0 top
U$114  [#RST#30]  82.42,16.65 0 top
U$115  [SFE_LOGO_NAME_.2]  96.77,62.74 0 bottom
U$116  [SFE_LOGO_FLAME_.2]  82.04,61.72 0 top
U$117  [#D0#AD0#18]  107.19,50.04 0 bottom
U$118  [#D2#AD2#19]  107.19,44.83 0 bottom
U$119  [#D3#AD3#23]  107.19,42.29 0 bottom
U$120  [#D6##RTS##25]  107.06,39.75 0 bottom
U$121  [#D5#ASSOC#25]  108.2,37.34 0 bottom
U$122  [#D9##SLP##28]  106.93,32.26 0 bottom
U$123  [#D7##CTS##26]  107.06,29.72 0 bottom
U$124  [#D4#PICO#25]  107.44,27.05 0 bottom
U$125  [#GND#0]  87.76,27.18 0 bottom
U$126  [#D8##DTR##27]  86.36,29.72 0 bottom
U$127  [#RSSI#D10#17]  85.98,37.34 0 bottom
U$128  [#SDA#D11#9]  86.23,34.8 0 bottom
U$129  [##RST##15]  87.76,39.75 0 bottom
U$130  [#POCI#D12#24]  85.85,42.42 0 bottom
U$131  [#RXI#D14#15]  86.36,44.83 0 bottom
U$132  [#TXO#D13#13]  85.85,47.5 0 bottom
U$133  [#EN#17]  105.16,24.64 0 top
U$134  [#ALED#21]  101.35,15.24 90 bottom
U$135  [#RLED#22]  96.39,15.24 90 bottom
U$136  [#PLED#20]  98.81,15.24 90 bottom
U$137  [#TXO#8]  93.34,47.5 0 top
U$138  [#RXI#7]  92.84,44.83 0 top
U$139  [#POCI#32]  93.34,42.42 0 top
U$140  [##RST##13]  92.96,39.88 0 top
U$141  [##RTS##14]  100.46,39.88 0 top
U$142  [##CS##26]  100.97,42.29 0 top
U$143  [#SCLK#33]  100.08,44.83 0 top
U$144  [#SCL#9]  100.58,47.5 0 top
U$145  [#D0#3]  100.97,50.04 0 top
U$146  [#VIN#4]  88.01,24.51 0 top
U$147  [#EN#15]  105.16,24.64 0 bottom
U$148  [#SHLD#36]  90.04,12.19 0 bottom
U$149  [#NC#1]  88.27,32.26 0 bottom
U$150  [#NC#3]  105.41,34.8 0 bottom
U$151  [USB#C1342]  96.9,58.55 0 top
U$152  [USB#C1342]  96.77,58.55 0 bottom
U$153  [UART34]  89.15,16.76 0 top
U$154  [#GND#0]  87.76,27.18 0 top
U$155  [XBEE340]  92.96,60.2 0 top
U$156  [XBEE340]  100.58,60.2 0 bottom
U$157  [ASC32]  99.9,11.71 90 top
U$158  [RSSI31]  94.82,11.71 90 top
U$159  [PWR29]  97.23,11.71 90 top
U$160  [#D1#AD1#SCL#8]  108.71,47.5 0 bottom
U$161  [EXPLORER1344]  101.85,60.2 0 top
U$162  [EXPLORER1344]  91.69,60.2 0 bottom
U$163  [#3V3#1]  20.95,112.78 0 top
U$164  [#I2C#33]  33.78,82.68 0 bottom
U$165  [#3V3#1]  15.62,112.78 0 bottom
U$166  [#VIN#4]  15.88,87.25 0 bottom
U$167  [D03]  39.24,79.36 0 top
U$168  [#RST#30]  10.29,79.39 0 top
U$169  [SFE_LOGO_NAME_.2]  24.64,125.48 0 bottom
U$170  [SFE_LOGO_FLAME_.2]  9.91,124.46 0 top
U$171  [#D0#AD0#18]  35.05,112.78 0 bottom
U$172  [#D2#AD2#19]  35.05,107.57 0 bottom
U$173  [#D3#AD3#23]  35.05,105.03 0 bottom
U$174  [#D6##RTS##25]  34.92,102.49 0 bottom
U$175  [#D5#ASSOC#25]  36.07,100.08 0 bottom
U$176  [#D9##SLP##28]  34.8,95 0 bottom
U$177  [#D7##CTS##26]  34.92,92.46 0 bottom
U$178  [#D4#PICO#25]  35.31,89.79 0 bottom
U$179  [#GND#0]  15.62,89.92 0 bottom
U$180  [#D8##DTR##27]  14.22,92.46 0 bottom
U$181  [#RSSI#D10#17]  13.84,100.08 0 bottom
U$182  [#SDA#D11#9]  14.1,97.54 0 bottom
U$183  [##RST##15]  15.62,102.49 0 bottom
U$184  [#POCI#D12#24]  13.72,105.16 0 bottom
U$185  [#RXI#D14#15]  14.22,107.57 0 bottom
U$186  [#TXO#D13#13]  13.72,110.24 0 bottom
U$187  [#EN#17]  33.02,87.38 0 top
U$188  [#ALED#21]  29.21,77.98 90 bottom
U$189  [#RLED#22]  24.26,77.98 90 bottom
U$190  [#PLED#20]  26.67,77.98 90 bottom
U$191  [#TXO#8]  21.21,110.24 0 top
U$192  [#RXI#7]  20.7,107.57 0 top
U$193  [#POCI#32]  21.21,105.16 0 top
U$194  [##RST##13]  20.83,102.62 0 top
U$195  [##RTS##14]  28.32,102.62 0 top
U$196  [##CS##26]  28.83,105.03 0 top
U$197  [#SCLK#33]  27.94,107.57 0 top
U$198  [#SCL#9]  28.45,110.24 0 top
U$199  [#D0#3]  28.83,112.78 0 top
U$200  [#VIN#4]  15.88,87.25 0 top
U$201  [#EN#15]  33.02,87.38 0 bottom
U$202  [#SHLD#36]  17.91,74.93 0 bottom
U$203  [#NC#1]  16.13,95 0 bottom
U$204  [#NC#3]  33.27,97.54 0 bottom
U$205  [USB#C1342]  24.77,121.28 0 top
U$206  [USB#C1342]  24.64,121.28 0 bottom
U$207  [UART34]  17.02,79.5 0 top
U$208  [#GND#0]  15.62,89.92 0 top
U$209  [XBEE340]  20.83,122.94 0 top
U$210  [XBEE340]  28.45,122.94 0 bottom
U$211  [ASC32]  27.76,74.45 90 top
U$212  [RSSI31]  22.68,74.45 90 top
U$213  [PWR29]  25.1,74.45 90 top
U$214  [#D1#AD1#SCL#8]  36.58,110.24 0 bottom
U$215  [EXPLORER1344]  29.72,122.94 0 top
U$216  [EXPLORER1344]  19.56,122.94 0 bottom
U$217  [#3V3#1]  57.02,112.78 0 top
U$218  [#I2C#33]  69.85,82.68 0 bottom
U$219  [#3V3#1]  51.69,112.78 0 bottom
U$220  [#VIN#4]  51.94,87.25 0 bottom
U$221  [D03]  75.31,79.36 0 top
U$222  [#RST#30]  46.35,79.39 0 top
U$223  [SFE_LOGO_NAME_.2]  60.71,125.48 0 bottom
U$224  [SFE_LOGO_FLAME_.2]  45.97,124.46 0 top
U$225  [#D0#AD0#18]  71.12,112.78 0 bottom
U$226  [#D2#AD2#19]  71.12,107.57 0 bottom
U$227  [#D3#AD3#23]  71.12,105.03 0 bottom
U$228  [#D6##RTS##25]  70.99,102.49 0 bottom
U$229  [#D5#ASSOC#25]  72.14,100.08 0 bottom
U$230  [#D9##SLP##28]  70.87,95 0 bottom
U$231  [#D7##CTS##26]  70.99,92.46 0 bottom
U$232  [#D4#PICO#25]  71.37,89.79 0 bottom
U$233  [#GND#0]  51.69,89.92 0 bottom
U$234  [#D8##DTR##27]  50.29,92.46 0 bottom
U$235  [#RSSI#D10#17]  49.91,100.08 0 bottom
U$236  [#SDA#D11#9]  50.16,97.54 0 bottom
U$237  [##RST##15]  51.69,102.49 0 bottom
U$238  [#POCI#D12#24]  49.78,105.16 0 bottom
U$239  [#RXI#D14#15]  50.29,107.57 0 bottom
U$240  [#TXO#D13#13]  49.78,110.24 0 bottom
U$241  [#EN#17]  69.09,87.38 0 top
U$242  [#ALED#21]  65.28,77.98 90 bottom
U$243  [#RLED#22]  60.32,77.98 90 bottom
U$244  [#PLED#20]  62.74,77.98 90 bottom
U$245  [#TXO#8]  57.28,110.24 0 top
U$246  [#RXI#7]  56.77,107.57 0 top
U$247  [#POCI#32]  57.28,105.16 0 top
U$248  [##RST##13]  56.9,102.62 0 top
U$249  [##RTS##14]  64.39,102.62 0 top
U$250  [##CS##26]  64.9,105.03 0 top
U$251  [#SCLK#33]  64.01,107.57 0 top
U$252  [#SCL#9]  64.52,110.24 0 top
U$253  [#D0#3]  64.9,112.78 0 top
U$254  [#VIN#4]  51.94,87.25 0 top
U$255  [#EN#15]  69.09,87.38 0 bottom
U$256  [#SHLD#36]  53.97,74.93 0 bottom
U$257  [#NC#1]  52.2,95 0 bottom
U$258  [#NC#3]  69.34,97.54 0 bottom
U$259  [USB#C1342]  60.83,121.28 0 top
U$260  [USB#C1342]  60.71,121.28 0 bottom
U$261  [UART34]  53.09,79.5 0 top
U$262  [#GND#0]  51.69,89.92 0 top
U$263  [XBEE340]  56.9,122.94 0 top
U$264  [XBEE340]  64.52,122.94 0 bottom
U$265  [ASC32]  63.83,74.45 90 top
U$266  [RSSI31]  58.75,74.45 90 top
U$267  [PWR29]  61.16,74.45 90 top
U$268  [#D1#AD1#SCL#8]  72.64,110.24 0 bottom
U$269  [EXPLORER1344]  65.79,122.94 0 top
U$270  [EXPLORER1344]  55.63,122.94 0 bottom
U$271  [#3V3#1]  93.09,112.78 0 top
U$272  [#I2C#33]  105.92,82.68 0 bottom
U$273  [#3V3#1]  87.76,112.78 0 bottom
U$274  [#VIN#4]  88.01,87.25 0 bottom
U$275  [D03]  111.38,79.36 0 top
U$276  [#RST#30]  82.42,79.39 0 top
U$277  [SFE_LOGO_NAME_.2]  96.77,125.48 0 bottom
U$278  [SFE_LOGO_FLAME_.2]  82.04,124.46 0 top
U$279  [#D0#AD0#18]  107.19,112.78 0 bottom
U$280  [#D2#AD2#19]  107.19,107.57 0 bottom
U$281  [#D3#AD3#23]  107.19,105.03 0 bottom
U$282  [#D6##RTS##25]  107.06,102.49 0 bottom
U$283  [#D5#ASSOC#25]  108.2,100.08 0 bottom
U$284  [#D9##SLP##28]  106.93,95 0 bottom
U$285  [#D7##CTS##26]  107.06,92.46 0 bottom
U$286  [#D4#PICO#25]  107.44,89.79 0 bottom
U$287  [#GND#0]  87.76,89.92 0 bottom
U$288  [#D8##DTR##27]  86.36,92.46 0 bottom
U$289  [#RSSI#D10#17]  85.98,100.08 0 bottom
U$290  [#SDA#D11#9]  86.23,97.54 0 bottom
U$291  [##RST##15]  87.76,102.49 0 bottom
U$292  [#POCI#D12#24]  85.85,105.16 0 bottom
U$293  [#RXI#D14#15]  86.36,107.57 0 bottom
U$294  [#TXO#D13#13]  85.85,110.24 0 bottom
U$295  [#EN#17]  105.16,87.38 0 top
U$296  [#ALED#21]  101.35,77.98 90 bottom
U$297  [#RLED#22]  96.39,77.98 90 bottom
U$298  [#PLED#20]  98.81,77.98 90 bottom
U$299  [#TXO#8]  93.34,110.24 0 top
U$300  [#RXI#7]  92.84,107.57 0 top
U$301  [#POCI#32]  93.34,105.16 0 top
U$302  [##RST##13]  92.96,102.62 0 top
U$303  [##RTS##14]  100.46,102.62 0 top
U$304  [##CS##26]  100.97,105.03 0 top
U$305  [#SCLK#33]  100.08,107.57 0 top
U$306  [#SCL#9]  100.58,110.24 0 top
U$307  [#D0#3]  100.97,112.78 0 top
U$308  [#VIN#4]  88.01,87.25 0 top
U$309  [#EN#15]  105.16,87.38 0 bottom
U$310  [#SHLD#36]  90.04,74.93 0 bottom
U$311  [#NC#1]  88.27,95 0 bottom
U$312  [#NC#3]  105.41,97.54 0 bottom
U$313  [USB#C1342]  96.9,121.28 0 top
U$314  [USB#C1342]  96.77,121.28 0 bottom
U$315  [UART34]  89.15,79.5 0 top
U$316  [#GND#0]  87.76,89.92 0 top
U$317  [XBEE340]  92.96,122.94 0 top
U$318  [XBEE340]  100.58,122.94 0 bottom
U$319  [ASC32]  99.9,74.45 90 top
U$320  [RSSI31]  94.82,74.45 90 top
U$321  [PWR29]  97.23,74.45 90 top
U$322  [#D1#AD1#SCL#8]  108.71,110.24 0 bottom
U$323  [EXPLORER1344]  101.85,122.94 0 top
U$324  [EXPLORER1344]  91.69,122.94 0 bottom

## Library data of the parts
ALED ALED1-ALED5 I2C_PU I2C_PU1-I2C_PU5 PLED PLED1-PLED5 RLED RLED1-RLED5 SHLD SHLD1-SHLD5 = SparkFun-Jumpers
C1 C17 C30 C43 C56 C69 = SparkFun-Capacitors; PROD_ID: CAP-09824
C2 C4 C15 C16 C28 C29 C41 C42 C54 C55 C67 C68 = SparkFun-Capacitors; PROD_ID: CAP-14464
C3 C13 C27 C40 C53 C66 = SparkFun-Capacitors; PROD_ID: CAP-08604
C5 C24 C37 C50 C63 C76 = SparkFun-Capacitors; PROD_ID: CAP-08913
C6 C7 C18 C19 C31 C32 C44 C45 C57 C58 C70 C71 = SparkFun-Capacitors; PROD_ID: CAP-00867
C8 C25 C38 C51 C64 C77 = SparkFun-Capacitors; PROD_ID: CAP-11812
C9 C11 C14 C20 C22 C23 C33 C35 C36 C46 C48 C49 C59 C61 C62 C72 C74 C75 = SparkFun-Capacitors; PROD_ID: CAP-00810
C10 C21 C34 C47 C60 C73 = SparkFun-Capacitors; PROD_ID: CAP-11015
C12 C26 C39 C52 C65 C78 = SparkFun-Capacitors; PROD_ID: CAP-08280
D1 D2 D7 D10 D13 D16 = SparkFun-LED; PROD_ID: DIO-17976
D3 D5 D8 D11 D14 D17 = SparkFun-LED; PROD_ID: DIO-08575
D4 D6 D9 D12 D15 D18 = SparkFun-LED; PROD_ID: DIO-09003
E$1-E$4 FD1-FD24 LOGO1-LOGO18 U$47 U$50 U$61 U$63 U$115 U$116 U$169 U$170 U$223 U$224 U$277 U$278 = SparkFun-Aesthetics
E$5 E$6 = SparkFun-Retired
H1-H24 = SparkFun-Hardware
J1 J5 J6 J8-J10 J13 J14 J16 J17 J20 J21 J23 J24 J27 J28 J30 J31 J34 J35 J37 J38 J41 J42 = SparkFun-Connectors
J2 J11 J18 J25 J32 J39 = xbee_smart_modem
J3 J12 J19 J26 J33 J40 = SparkFun-Connectors; PROD_ID: CONN-14122
J4 J7 J15 J22 J29 J36 = SparkFun-Connectors; PROD_ID: CONN-13694
L1-L6 = SparkFun-Coils; PROD_ID: NDUC-18014
R1 R2 R4 R6 R10 R12 R14 R15 R17 R18 R20 R22 R25 R26 R28 R30 R33 R34 R36 R38 R41 R42 R44 R46 = SparkFun-Resistors; PROD_ID: RES-08272
R3 R9 R21 R29 R37 R45 = SparkFun-Resistors; PROD_ID: RES-00824
R5 R11 R19 R27 R35 R43 = SparkFun-Resistors; PROD_ID: RES-07857
R7 R8 R13 R16 R23 R24 R31 R32 R39 R40 R47 R48 = SparkFun-Resistors; PROD_ID: RES-12083
S1-S12 = SparkFun-Switches; PROD_ID: SWCH-14139
U1 U2 U6 U10 U13 U16 = SparkFun-IC-Power; PROD_ID: VREG-15244
U3 U5 U8 U11 U14 U17 = SparkFun-DiscreteSemi; PROD_ID: IC-13538
U4 U7 U9 U12 U15 U18 = SparkFun-IC-Comms; PROD_ID: IC-11524
U$1 U$2 U$9 U$10 U$23 U$26 U$29-U$34 U$39 U$41 U$43 U$44 U$46 U$66 U$92 U$101-U$105 U$107-U$112 U$114 U$146 U$155-U$159 U$161-U$166 U$168 U$200 U$209-U$213 U$215-U$220 U$222 U$254 U$263-U$267 U$269-U$274 U$276 U$308 U$317-U$321 U$323 U$324 = top
U$3-U$6 U$8 U$11-U$20 U$22 U$24 U$25 U$28 U$35-U$38 U$48 U$49 U$51-U$53 U$55-U$57 U$62 U$68-U$82 U$94 U$95 U$97-U$100 U$106 U$117-U$136 U$148 U$149 U$151-U$154 U$160 U$171-U$190 U$202 U$203 U$205-U$208 U$214 U$225-U$244 U$256 U$257 U$259-U$262 U$268 U$279-U$298 U$310 U$311 U$313-U$316 U$322 = topmirror
U$7 U$21 U$27 U$45 U$54 U$58-U$60 U$64 U$65 U$67 U$83-U$91 U$93 U$96 U$137-U$145 U$147 U$150 U$191-U$199 U$201 U$204 U$245-U$253 U$255 U$258 U$299-U$307 U$309 U$312 = botmirror
U$40 U$42 U$113 U$167 U$221 U$275 = bot

## Nets
3.3V: C2.1 C4.1 C5.1 C7.1 C8.1 C9.1 C10.1 C11.1 C12.1 C14.1 I2C_PU.2 J2.1 J4.2 J6.1 L1.P$2 R11.1 U2.1 U7.3 U7.13 U7.14 U7.15
3.3V1: C15.1 C16.1 C19.1 C20.1 C21.1 C22.1 C23.1 C24.1 C25.1 C26.1 I2C_PU1.2 J7.2 J10.1 J11.1 L2.P$2 R5.1 U1.1 U4.3 U4.13 U4.14 U4.15
3.3V2: C28.1 C29.1 C32.1 C33.1 C34.1 C35.1 C36.1 C37.1 C38.1 C39.1 I2C_PU2.2 J15.2 J17.1 J18.1 L3.P$2 R19.1 U6.1 U9.3 U9.13 U9.14 U9.15
3.3V3: C41.1 C42.1 C45.1 C46.1 C47.1 C48.1 C49.1 C50.1 C51.1 C52.1 I2C_PU3.2 J22.2 J24.1 J25.1 L4.P$2 R27.1 U10.1 U12.3 U12.13 U12.14 U12.15
3.3V4: C54.1 C55.1 C58.1 C59.1 C60.1 C61.1 C62.1 C63.1 C64.1 C65.1 I2C_PU4.2 J29.2 J31.1 J32.1 L5.P$2 R35.1 U13.1 U15.3 U15.13 U15.14 U15.15
3.3V5: C67.1 C68.1 C71.1 C72.1 C73.1 C74.1 C75.1 C76.1 C77.1 C78.1 I2C_PU5.2 J36.2 J38.1 J39.1 L6.P$2 R43.1 U16.1 U18.3 U18.13 U18.14 U18.15
!RESET!: C6.1 J2.5 J6.5 S1.1 S1.2
!RESET!1: C18.1 J10.5 J11.5 S3.1 S3.2
!RESET!2: C31.1 J17.5 J18.5 S5.1 S5.2
!RESET!3: C44.1 J24.5 J25.5 S7.1 S7.2
!RESET!4: C57.1 J31.5 J32.5 S9.1 S9.2
!RESET!5: C70.1 J38.5 J39.5 S11.1 S11.2
D0: J2.20 J5.1 S2.1 S2.2
D1: J9.1 J11.20 S4.1 S4.2
D1/SCL: J2.19 J4.4 J5.2 R15.1
D1/SCL1: J7.4 J9.2 J11.19 R4.1
D1/SCL2: J15.4 J16.2 J18.19 R18.1
D1/SCL3: J22.4 J23.2 J25.19 R26.1
D1/SCL4: J29.4 J30.2 J32.19 R34.1
D1/SCL5: J36.4 J37.2 J39.19 R42.1
D2: J16.1 J18.20 S6.1 S6.2
D2/SPI_CLK: J2.18 J5.3
D2/SPI_CLK1: J9.3 J11.18
D2/SPI_CLK2: J16.3 J18.18
D2/SPI_CLK3: J23.3 J25.18
D2/SPI_CLK4: J30.3 J32.18
D2/SPI_CLK5: J37.3 J39.18
D3: J23.1 J25.20 S8.1 S8.2
D3/SPI_!CS!: J2.17 J5.4
D3/SPI_!CS!1: J9.4 J11.17
D3/SPI_!CS!2: J16.4 J18.17
D3/SPI_!CS!3: J23.4 J25.17
D3/SPI_!CS!4: J30.4 J32.17
D3/SPI_!CS!5: J37.4 J39.17
D4: J30.1 J32.20 S10.1 S10.2
D4/SPI_PICO: J2.11 J5.10
D4/SPI_PICO1: J9.10 J11.11
D4/SPI_PICO2: J16.10 J18.11
D4/SPI_PICO3: J23.10 J25.11
D4/SPI_PICO4: J30.10 J32.11
D4/SPI_PICO5: J37.10 J39.11
D5: J37.1 J39.20 S12.1 S12.2
D5/ASSOCIATE: J2.15 J5.6 R12.1
D5/ASSOCIATE1: J9.6 J11.15 R6.1
D5/ASSOCIATE2: J16.6 J18.15 R20.1
D5/ASSOCIATE3: J23.6 J25.15 R28.1
D5/ASSOCIATE4: J30.6 J32.15 R36.1
D5/ASSOCIATE5: J37.6 J39.15 R44.1
D6/!RTS!: J2.16 J5.5 U7.2
D6/!RTS!1: J9.5 J11.16 U4.2
D6/!RTS!2: J16.5 J18.16 U9.2
D6/!RTS!3: J23.5 J25.16 U12.2
D6/!RTS!4: J30.5 J32.16 U15.2
D6/!RTS!5: J37.5 J39.16 U18.2
D7/!CTS!: J2.12 J5.9 U7.9
D7/!CTS!1: J9.9 J11.12 U4.9
D7/!CTS!2: J16.9 J18.12 U9.9
D7/!CTS!3: J23.9 J25.12 U12.9
D7/!CTS!4: J30.9 J32.12 U15.9
D7/!CTS!5: J37.9 J39.12 U18.9
D8/!DTR!: J2.9 J6.9 U7.1
D8/!DTR!1: J10.9 J11.9 U4.1
D8/!DTR!2: J17.9 J18.9 U9.1
D8/!DTR!3: J24.9 J25.9 U12.1
D8/!DTR!4: J31.9 J32.9 U15.1
D8/!DTR!5: J38.9 J39.9 U18.1
D9/!SLEEP!: J2.13 J5.8
D9/!SLEEP!1: J9.8 J11.13
D9/!SLEEP!2: J16.8 J18.13
D9/!SLEEP!3: J23.8 J25.13
D9/!SLEEP!4: J30.8 J32.13
D9/!SLEEP!5: J37.8 J39.13
D10/RSSI_PWM: J2.6 J6.6 R2.1
D10/RSSI_PWM1: J10.6 J11.6 R10.1
D10/RSSI_PWM2: J17.6 J18.6 R22.1
D10/RSSI_PWM3: J24.6 J25.6 R30.1
D10/RSSI_PWM4: J31.6 J32.6 R38.1
D10/RSSI_PWM5: J38.6 J39.6 R46.1
D11/SDA: J2.7 J4.3 J6.7 R14.1
D11/SDA1: J7.3 J10.7 J11.7 R1.1
D11/SDA2: J15.3 J17.7 J18.7 R17.1
D11/SDA3: J22.3 J24.7 J25.7 R25.1
D11/SDA4: J29.3 J31.7 J32.7 R33.1
D11/SDA5: J36.3 J38.7 J39.7 R41.1
D12/SPI_POCI: J2.4 J6.4
D12/SPI_POCI1: J10.4 J11.4
D12/SPI_POCI2: J17.4 J18.4
D12/SPI_POCI3: J24.4 J25.4
D12/SPI_POCI4: J31.4 J32.4
D12/SPI_POCI5: J38.4 J39.4
D13/TXO: J2.2 J6.2 U7.4
D13/TXO1: J10.2 J11.2 U4.4
D13/TXO2: J17.2 J18.2 U9.4
D13/TXO3: J24.2 J25.2 U12.4
D13/TXO4: J31.2 J32.2 U15.4
D13/TXO5: J38.2 J39.2 U18.4
D14/RXI: J2.3 J6.3 U7.20
D14/RXI1: J10.3 J11.3 U4.20
D14/RXI2: J17.3 J18.3 U9.20
D14/RXI3: J24.3 J25.3 U12.20
D14/RXI4: J31.3 J32.3 U15.20
D14/RXI5: J38.3 J39.3 U18.20
D+ [Diff pairs]: J3.A6 J3.B6 U5.6 U7.11
D+1 [Diff pairs]: J12.A6 J12.B6 U3.6 U4.11
D+2 [Diff pairs]: J19.A6 J19.B6 U8.6 U9.11
D+3 [Diff pairs]: J26.A6 J26.B6 U11.6 U12.11
D+4 [Diff pairs]: J33.A6 J33.B6 U14.6 U15.11
D+5 [Diff pairs]: J40.A6 J40.B6 U17.6 U18.11
D- [Diff pairs]: J3.A7 J3.B7 U5.4 U7.12
D-1 [Diff pairs]: J12.A7 J12.B7 U3.4 U4.12
D-2 [Diff pairs]: J19.A7 J19.B7 U8.4 U9.12
D-3 [Diff pairs]: J26.A7 J26.B7 U11.4 U12.12
D-4 [Diff pairs]: J33.A7 J33.B7 U14.4 U15.12
D-5 [Diff pairs]: J40.A7 J40.B7 U17.4 U18.12
EN: J8.1 R3.1 U2.2
EN1: J14.1 R9.1 U1.2
EN2: J21.1 R21.1 U6.2
EN3: J28.1 R29.1 U10.2
EN4: J35.1 R37.1 U13.2
EN5: J42.1 R45.1 U16.2
GND: ALED.1 C1.2 C2.2 C4.2 C5.2 C6.2 C7.2 C8.2 C9.2 C10.2 C11.2 C12.2 C14.2 J2.10 J3.GND J3.GND2 J4.1 J6.10 PLED.1 R7.1 R8.1 RLED.1 S1.3 S1.4 S2.3 S2.4 SHLD.1 U2.4 U5.2 U7.6 U7.16
GND1: ALED1.1 C15.2 C16.2 C17.2 C18.2 C19.2 C20.2 C21.2 C22.2 C23.2 C24.2 C25.2 C26.2 J7.1 J10.10 J11.10 J12.GND J12.GND2 PLED1.1 R13.1 R16.1 RLED1.1 S3.3 S3.4 S4.3 S4.4 SHLD1.1 U1.4 U3.2 U4.6 U4.16
GND2: ALED2.1 C28.2 C29.2 C30.2 C31.2 C32.2 C33.2 C34.2 C35.2 C36.2 C37.2 C38.2 C39.2 J15.1 J17.10 J18.10 J19.GND J19.GND2 PLED2.1 R23.1 R24.1 RLED2.1 S5.3 S5.4 S6.3 S6.4 SHLD2.1 U6.4 U8.2 U9.6 U9.16
GND3: ALED3.1 C41.2 C42.2 C43.2 C44.2 C45.2 C46.2 C47.2 C48.2 C49.2 C50.2 C51.2 C52.2 J22.1 J24.10 J25.10 J26.GND J26.GND2 PLED3.1 R31.1 R32.1 RLED3.1 S7.3 S7.4 S8.3 S8.4 SHLD3.1 U10.4 U11.2 U12.6 U12.16
GND4: ALED4.1 C54.2 C55.2 C56.2 C57.2 C58.2 C59.2 C60.2 C61.2 C62.2 C63.2 C64.2 C65.2 J29.1 J31.10 J32.10 J33.GND J33.GND2 PLED4.1 R39.1 R40.1 RLED4.1 S9.3 S9.4 S10.3 S10.4 SHLD4.1 U13.4 U14.2 U15.6 U15.16
GND5: ALED5.1 C67.2 C68.2 C69.2 C70.2 C71.2 C72.2 C73.2 C74.2 C75.2 C76.2 C77.2 C78.2 J36.1 J38.10 J39.10 J40.GND J40.GND2 PLED5.1 R47.1 R48.1 RLED5.1 S11.3 S11.4 S12.3 S12.4 SHLD5.1 U16.4 U17.2 U18.6 U18.16
N$1: C3.1 U2.6
N$2: D4.A R2.2
N$3: D4.C RLED.2
N$4: I2C_PU1.3 R1.2
N$5: J3.B5 R8.2
N$6: J3.A5 R7.2
N$7: D2.A R11.2
N$8: C3.2 L1.P$1 U2.5
N$9: I2C_PU1.1 R4.2
N$10: D1.A R5.2
N$11: I2C_PU.3 R14.2
N$12: D3.A R12.2
N$13: I2C_PU.1 R15.2
N$14: D5.A R6.2
N$15: ALED1.2 D5.C
N$16: D1.C PLED1.2
N$17: C13.1 U1.6
N$18: C13.2 L2.P$1 U1.5
N$19: D6.A R10.2
N$20: D6.C RLED1.2
N$21: ALED.2 D3.C
N$22: J12.B5 R16.2
N$23: D2.C PLED.2
N$24: J12.A5 R13.2
N$25: I2C_PU2.3 R17.2
N$26: I2C_PU2.1 R18.2
N$27: D7.A R19.2
N$28: D8.A R20.2
N$29: ALED2.2 D8.C
N$30: D7.C PLED2.2
N$31: C27.1 U6.6
N$32: C27.2 L3.P$1 U6.5
N$33: D9.A R22.2
N$34: D9.C RLED2.2
N$35: J19.B5 R24.2
N$36: J19.A5 R23.2
N$37: I2C_PU3.3 R25.2
N$38: I2C_PU3.1 R26.2
N$39: D10.A R27.2
N$40: D11.A R28.2
N$41: ALED3.2 D11.C
N$42: D10.C PLED3.2
N$43: C40.1 U10.6
N$44: C40.2 L4.P$1 U10.5
N$45: D12.A R30.2
N$46: D12.C RLED3.2
N$47: J26.B5 R32.2
N$48: J26.A5 R31.2
N$49: I2C_PU4.3 R33.2
N$50: I2C_PU4.1 R34.2
N$51: D13.A R35.2
N$52: D14.A R36.2
N$53: ALED4.2 D14.C
N$54: D13.C PLED4.2
N$55: C53.1 U13.6
N$56: C53.2 L5.P$1 U13.5
N$57: D15.A R38.2
N$58: D15.C RLED4.2
N$59: J33.B5 R40.2
N$60: J33.A5 R39.2
N$61: I2C_PU5.3 R41.2
N$62: I2C_PU5.1 R42.2
N$63: D16.A R43.2
N$64: D17.A R44.2
N$65: ALED5.2 D17.C
N$66: D16.C PLED5.2
N$67: C66.1 U16.6
N$68: C66.2 L6.P$1 U16.5
N$69: D18.A R46.2
N$70: D18.C RLED5.2
N$71: J40.B5 R48.2
N$72: J40.A5 R47.2
SHLD: J3.SHLD1 J3.SHLD2 J3.SHLD3 J3.SHLD4 J3.SHLD5 J3.SHLD6 J3.SHLD7 J3.SHLD8 SHLD.2
SHLD1: J12.SHLD1 J12.SHLD2 J12.SHLD3 J12.SHLD4 J12.SHLD5 J12.SHLD6 J12.SHLD7 J12.SHLD8 SHLD1.2
SHLD2: J19.SHLD1 J19.SHLD2 J19.SHLD3 J19.SHLD4 J19.SHLD5 J19.SHLD6 J19.SHLD7 J19.SHLD8 SHLD2.2
SHLD3: J26.SHLD1 J26.SHLD2 J26.SHLD3 J26.SHLD4 J26.SHLD5 J26.SHLD6 J26.SHLD7 J26.SHLD8 SHLD3.2
SHLD4: J33.SHLD1 J33.SHLD2 J33.SHLD3 J33.SHLD4 J33.SHLD5 J33.SHLD6 J33.SHLD7 J33.SHLD8 SHLD4.2
SHLD5: J40.SHLD1 J40.SHLD2 J40.SHLD3 J40.SHLD4 J40.SHLD5 J40.SHLD6 J40.SHLD7 J40.SHLD8 SHLD5.2
VIN: C1.1 J1.1 J3.VBUS1 J3.VBUS2 R3.2 U2.3 U5.5
VIN1: C17.1 J12.VBUS1 J12.VBUS2 J13.1 R9.2 U1.3 U3.5
VIN2: C30.1 J19.VBUS1 J19.VBUS2 J20.1 R21.2 U6.3 U8.5
VIN3: C43.1 J26.VBUS1 J26.VBUS2 J27.1 R29.2 U10.3 U11.5
VIN4: C56.1 J33.VBUS1 J33.VBUS2 J34.1 R37.2 U13.3 U14.5
VIN5: C69.1 J40.VBUS1 J40.VBUS2 J41.1 R45.2 U16.3 U17.5